# Altium PCB PCB-NW0101 Rev.A.1.PcbDoc (part 1 of 3)
Units mil, origin at the board's own origin, x right, y up, seen from the top; angles counter-clockwise.
Board outline 787.4 x 1377.95 mil, 6 copper layers (Top, GND, Inner3, Inner4, PWR, Bottom), stack 29.136 mil thick; 118 components, 126 nets, 559 pads, 476 vias.
Unrouted connection lines stored in the file: 214.
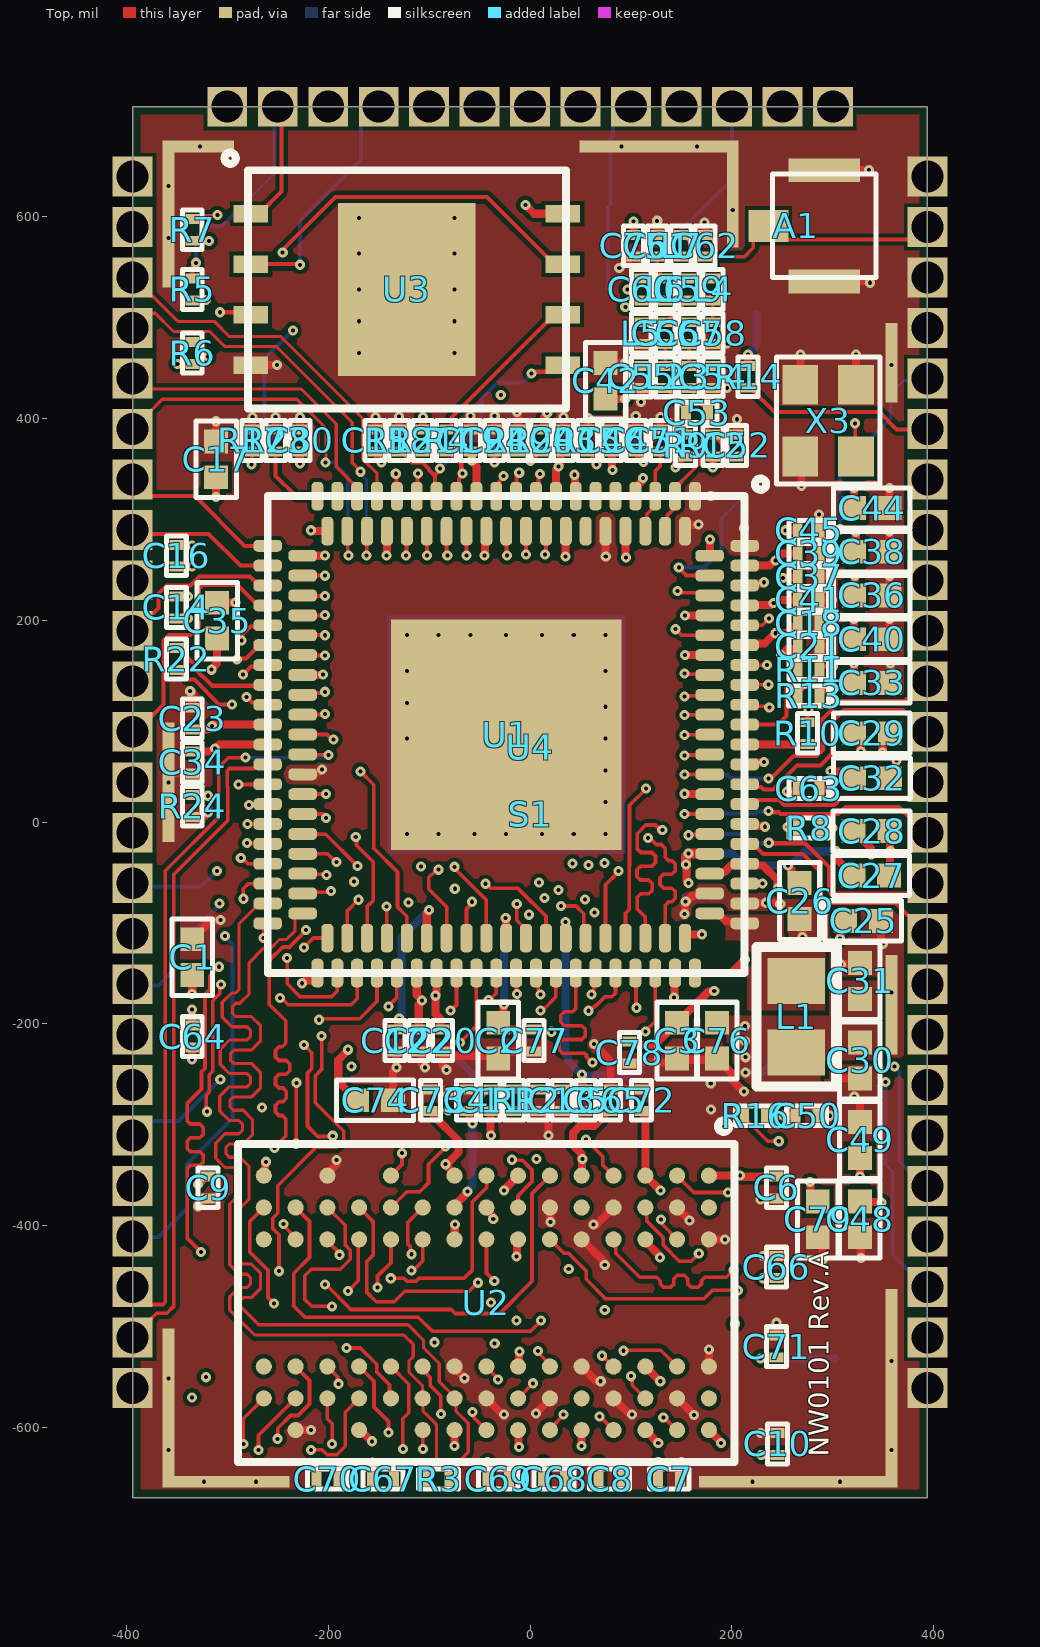
[diagram p0: Top view]
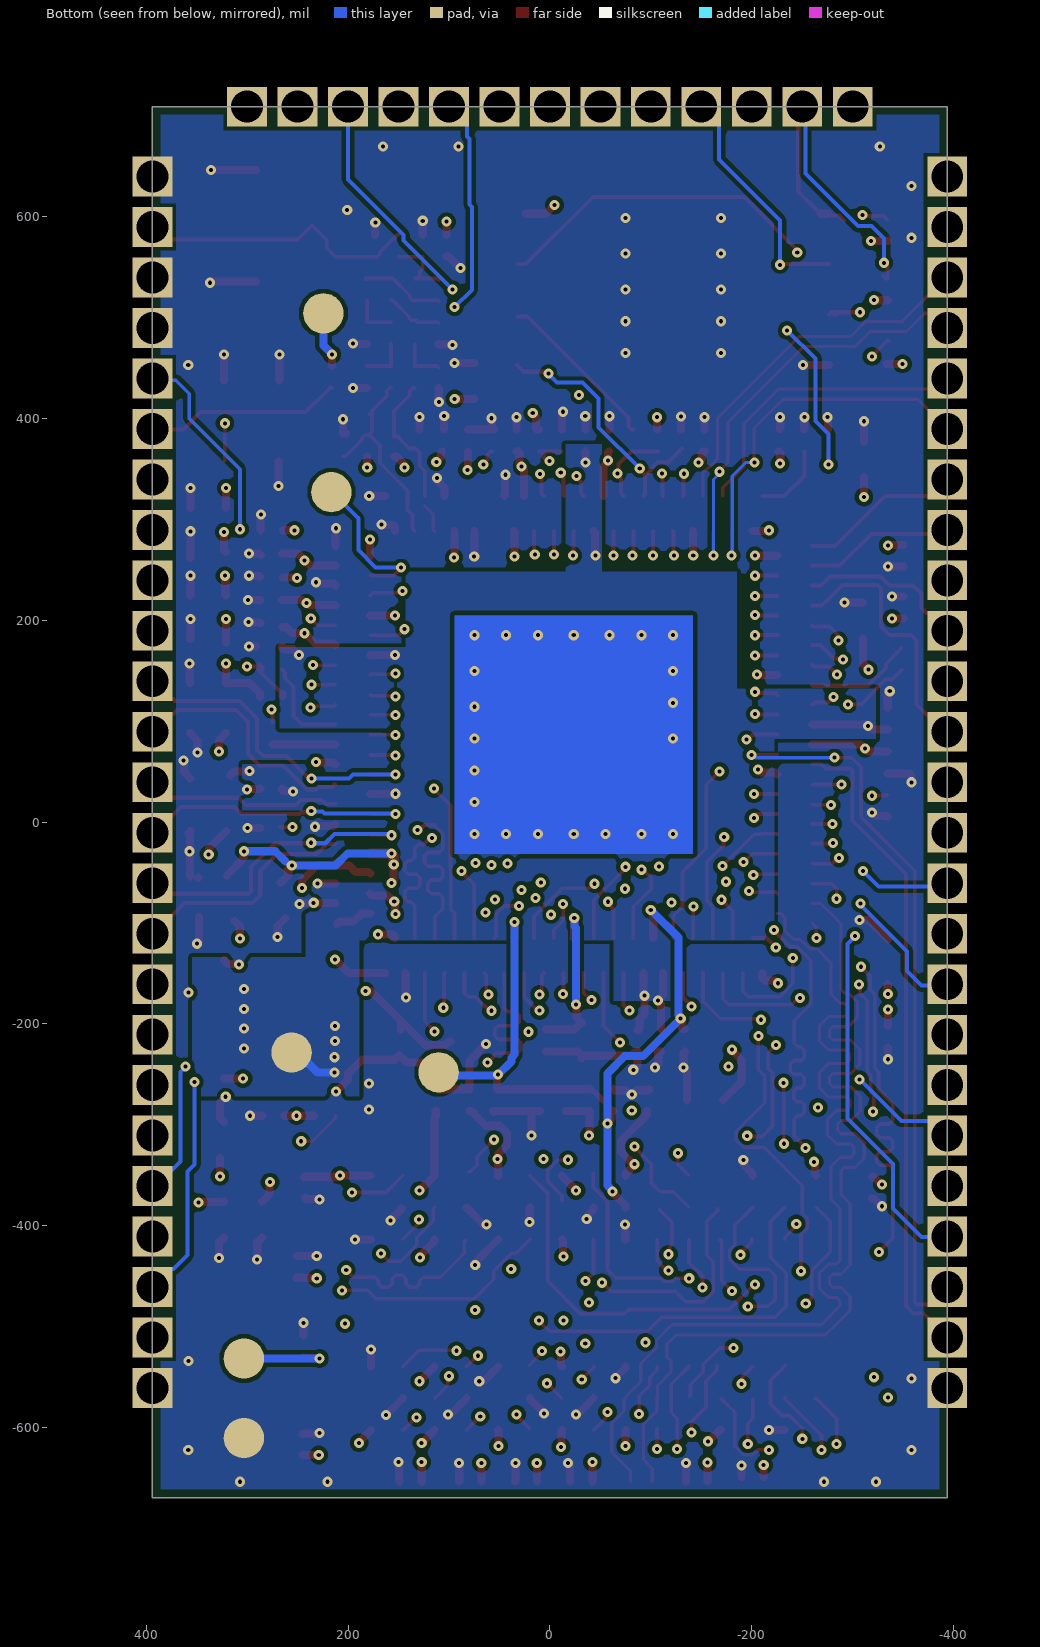
[diagram p1: Bottom view, seen from below]
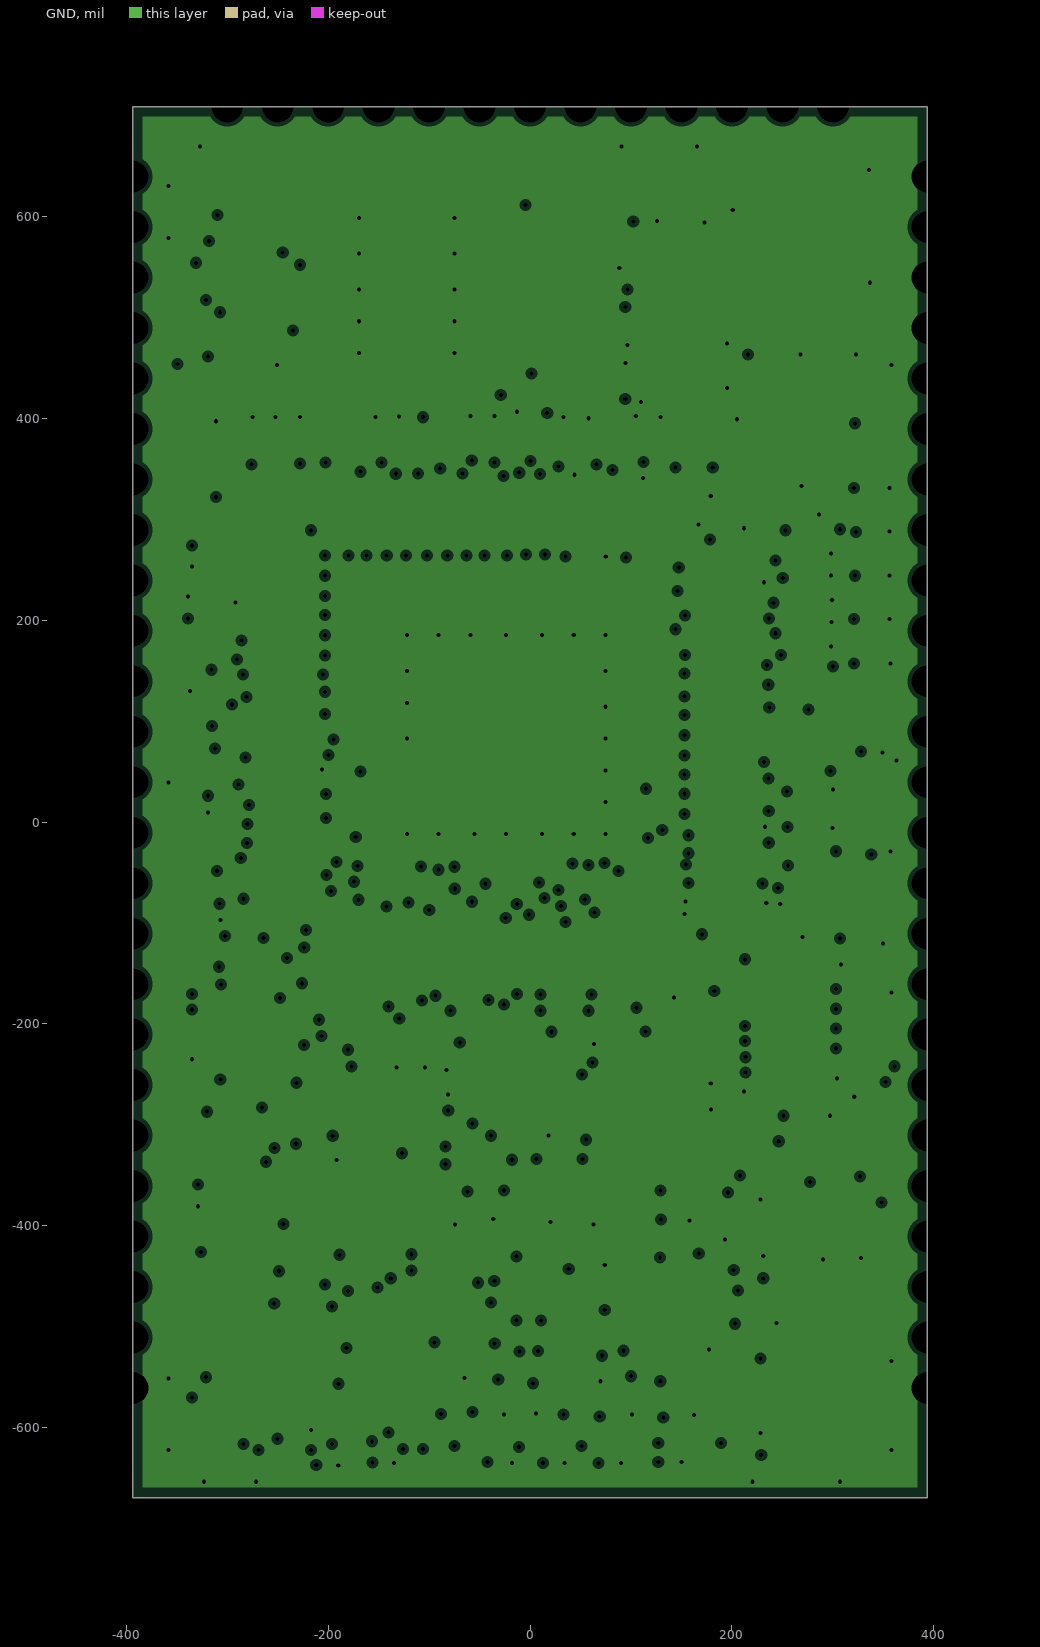
[diagram p2: GND, clearances drawn from the general rule]
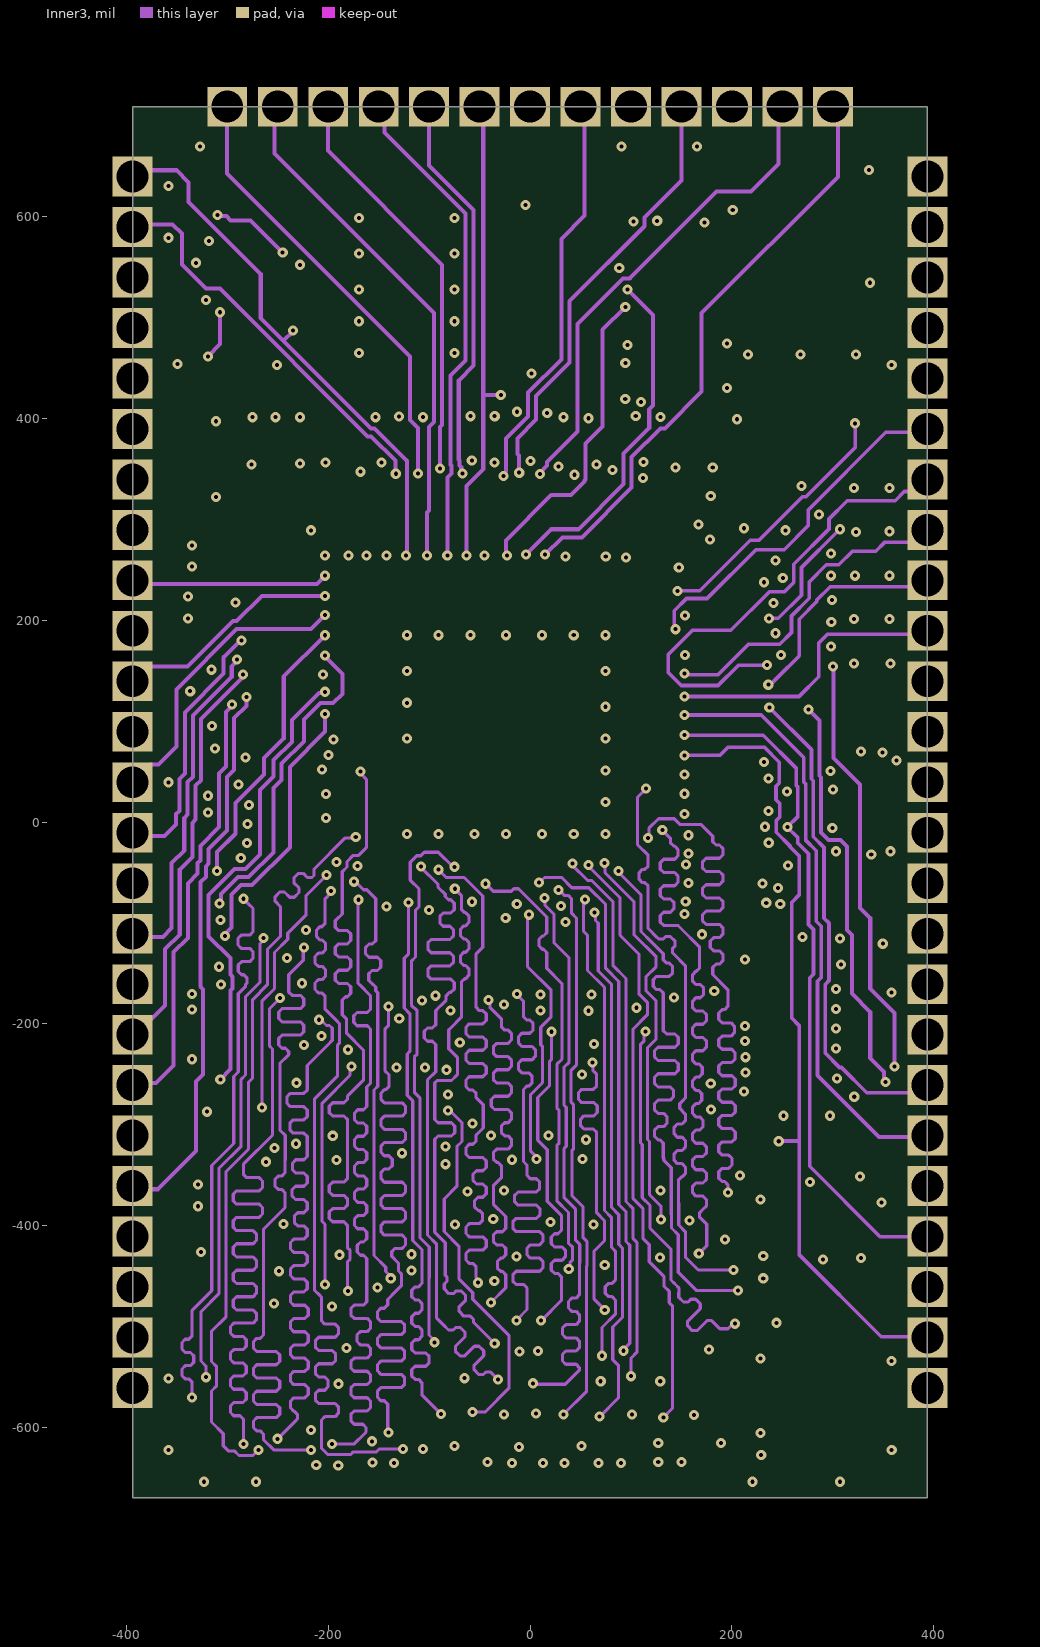
[diagram p3: Inner3]
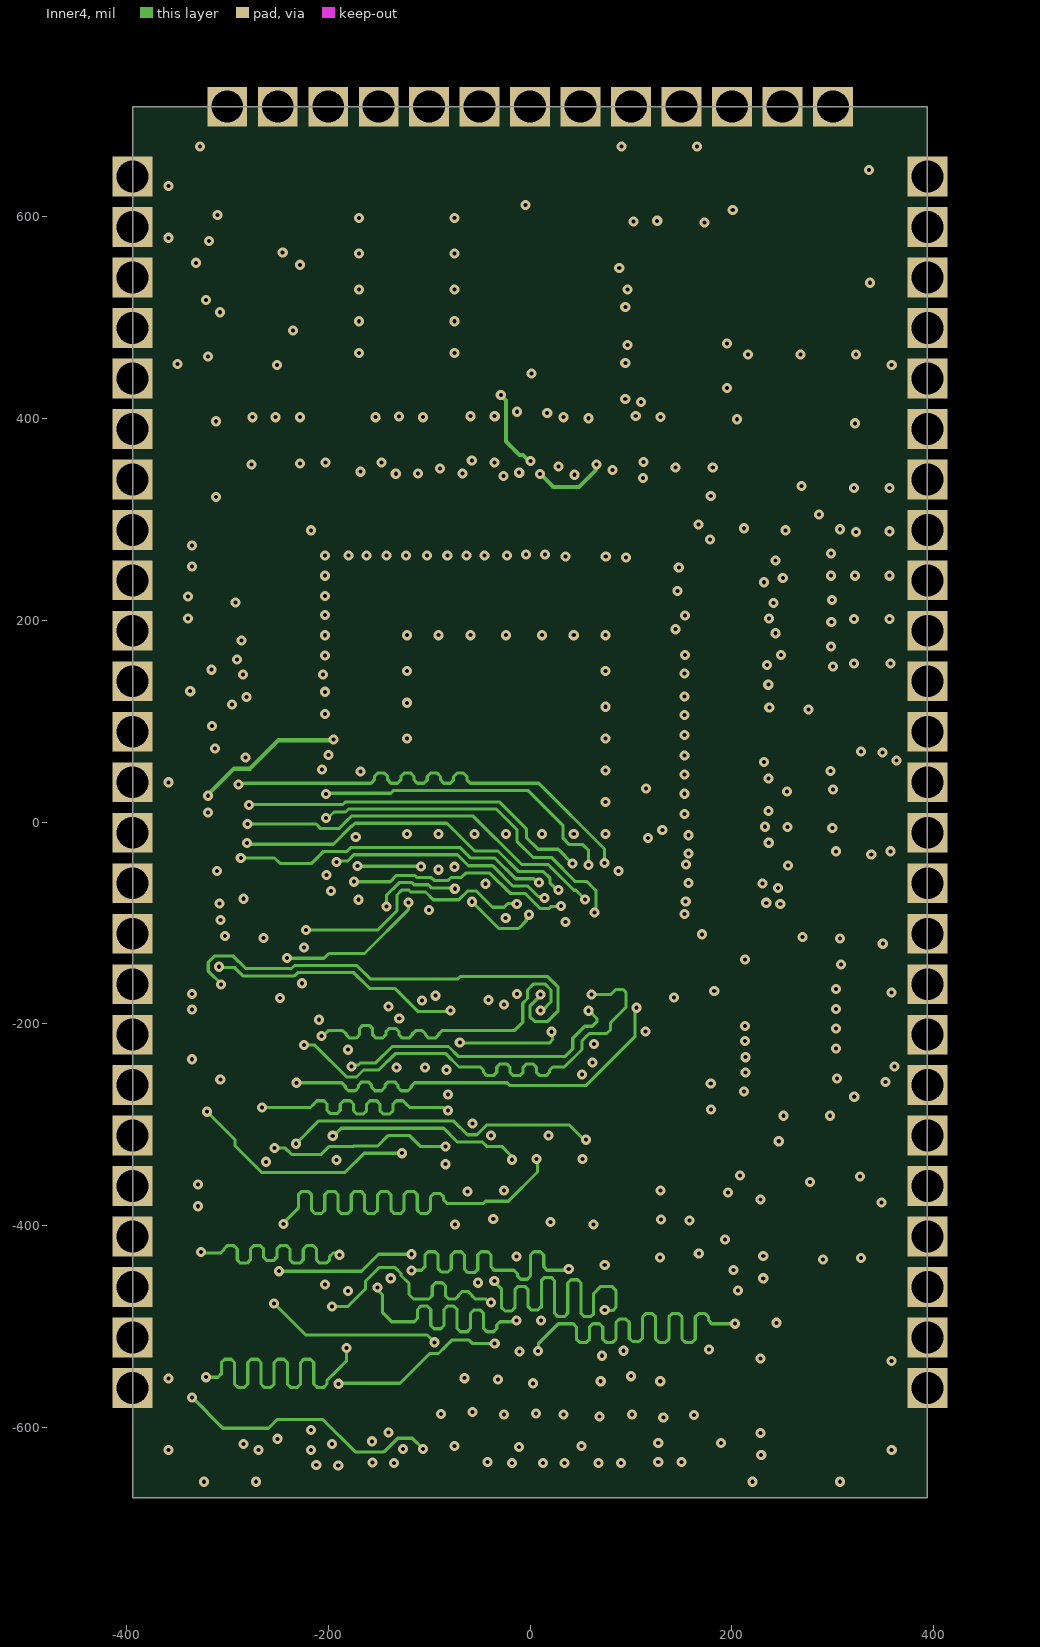
[diagram p4: Inner4]
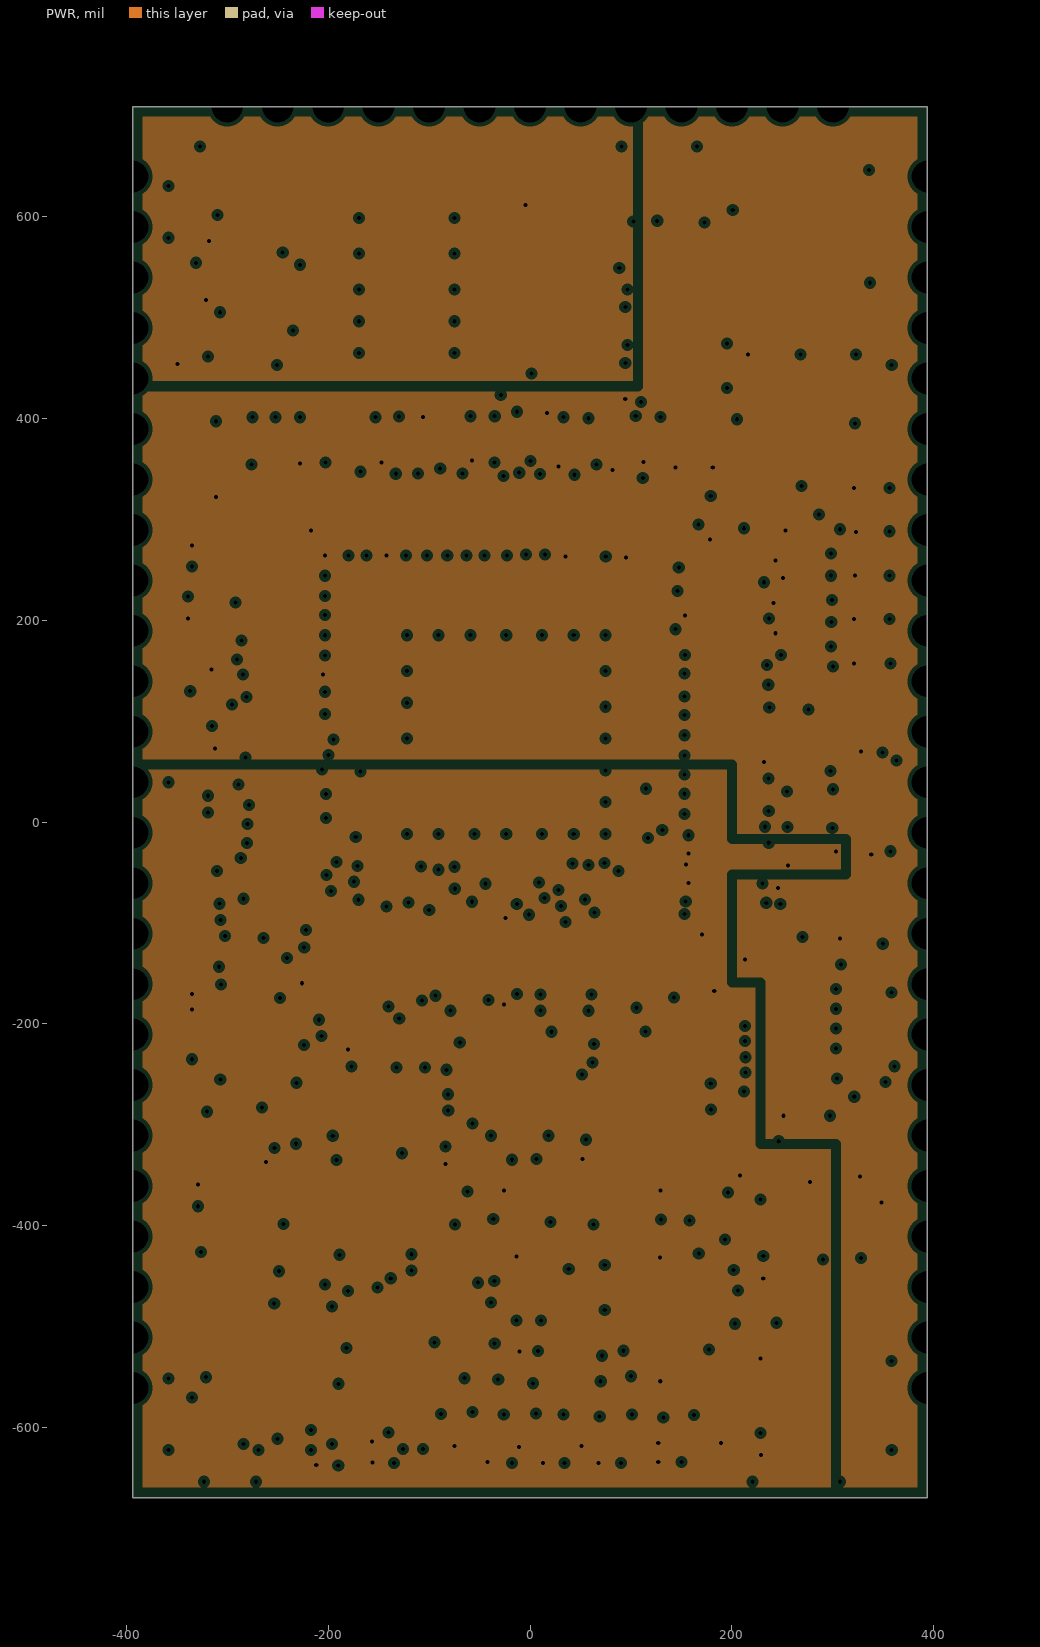
[diagram p5: PWR, clearances drawn from the general rule]
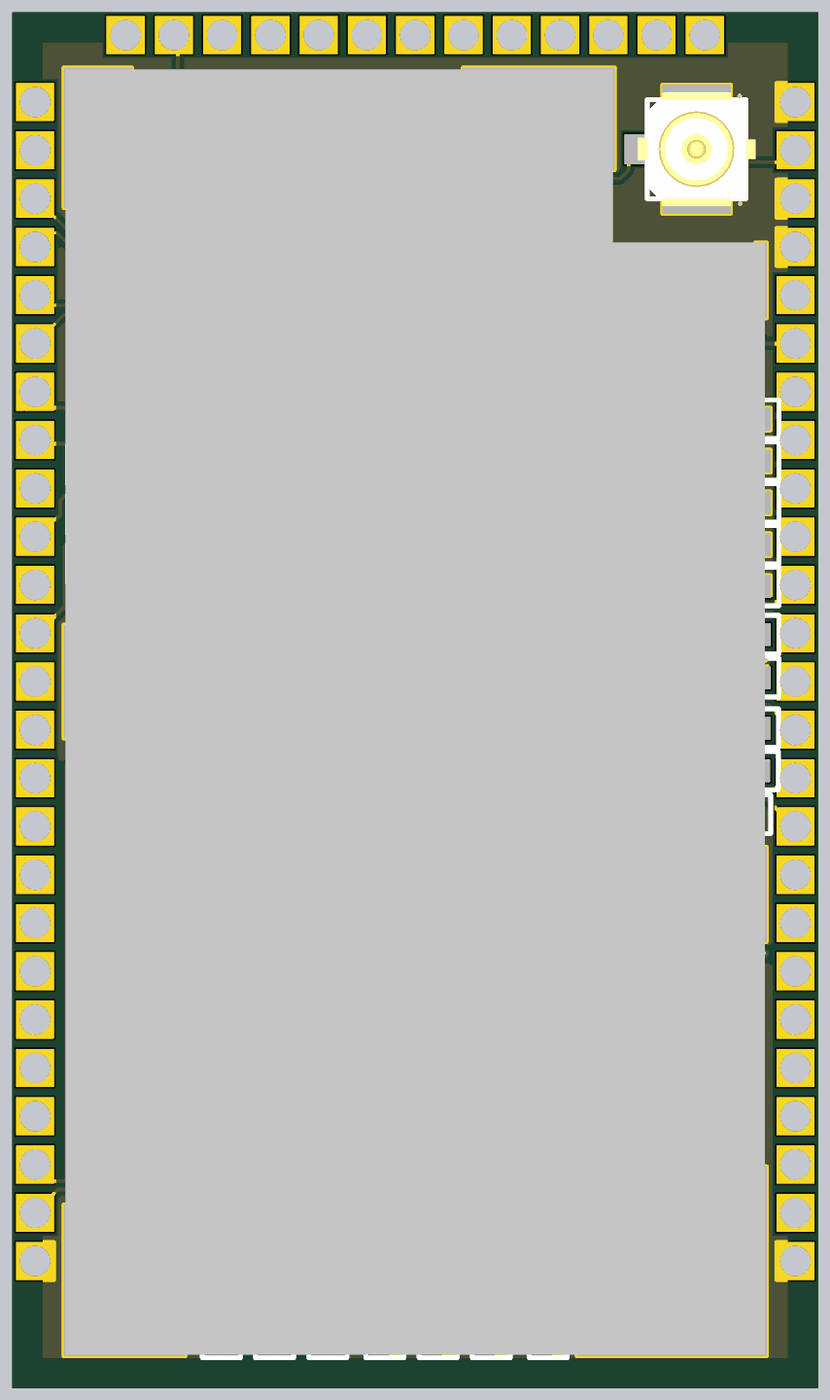
[diagram p8: 3D render of the assembled board from above, using the file's embedded part models]

## Layer stack, top to bottom
Solder Mask Top: solder mask 0.4, Solder Resist, Dk 3.5
Top: signal copper 1.35
Dielectric 1: dielectric 2.362, FR-4, Dk 4.3
GND: plane copper 1.378, net GND
Dielectric2: dielectric 3.1, FR-4, Dk 4.3
Inner3: signal copper 1.378
Dielectric3: dielectric 10, FR-4, Dk 4.3
Inner4: signal copper 1.378
Dielectric4: dielectric 3.1, FR-4, Dk 4.3
PWR: plane copper 1.378, net (Multiple Nets)
Dielectric5: dielectric 2.362, FR-4, Dk 4.3
Bottom: signal copper 1.35
Solder Mask Bottom: solder mask 0.4, Solder Resist, Dk 3.5

## Board outline
-393.7,708.66 393.7,708.66 393.7,-669.29 -393.7,-669.29

## Design rules (kind name [scope] priority, off if disabled: settings)
BoardOutlineClearance [All] p1: gap=8 ignorepadtopadclearanceinfootprint=FALSE except(0: THPad-OutlineEdge THPad-CavityEdge THPad-CutoutEdge; 6: Track-OutlineEdge Track-CavityEdge Track-CutoutEdge)
Clearance "Clearance - Default - DEFAULT - Net" [All] p1: gap=4 ignorepadtopadclearanceinfootprint=FALSE except(6: Via-Via)
ComponentClearance [All] p1: gap=0 collisioncheckmode=3 verticalgap=0 showdistances=FALSE
DiffPairsRouting "DiffPairsRouting - DiffPair - DDRCLK" [InDifferentialPair('DDRCLK')] p1: maxlimit=7 minlimit=5 mostfreqgap=5 toplayer_mingap=7 toplayer_prefgap=7 toplayer_minwidth=3.12 toplayer_maxwidth=3.12 toplayer_prefwidth=3.12 impedanceprofiledriven=TRUE impedanceprofileid={2A60CAE8-979D-4617-9CAD-F7D18D3C7651} impedanceprofilevalue=100.000000 maxuncoupledlength=500
DiffPairsRouting "DiffPairsRouting - DiffPair - ETH_R" [InDifferentialPair('ETH_R') or InDifferentialPair('ETH_T')] p2: maxlimit=7 minlimit=5 mostfreqgap=7 toplayer_mingap=7 toplayer_minwidth=3.12 toplayer_maxwidth=3.12 toplayer_prefwidth=3.12 bottomlayer_mingap=7 bottomlayer_minwidth=3.12 bottomlayer_maxwidth=3.12 bottomlayer_prefwidth=3.12 impedanceprofiledriven=TRUE impedanceprofileid={F7A5DDC0-C5B1-46B8-8866-6746753CC466} impedanceprofilevalue=100.000000 maxuncoupledlength=500
DiffPairsRouting "DiffPairsRouting - DiffPair - USB_D" [InDifferentialPair('USB')] p3: maxlimit=5 minlimit=4.5 mostfreqgap=5 toplayer_mingap=5 toplayer_minwidth=3.6 toplayer_maxwidth=3.6 toplayer_prefwidth=3.6 impedanceprofiledriven=TRUE impedanceprofileid={C5FCCC38-FD2C-4A72-8F5C-545B132D70D5} impedanceprofilevalue=90.000000 maxuncoupledlength=500
DiffPairsRouting "DiffPairsRouting - DiffPair - PCIE" [InDifferentialPair('PCIE_R') or InDifferentialPair('PCIE_T') or InDifferentialPair('PCIE_CLK')] p4: maxlimit=5 minlimit=4 mostfreqgap=5 toplayer_mingap=5 toplayer_minwidth=4.09 toplayer_maxwidth=4.09 toplayer_prefwidth=4.09 bottomlayer_mingap=5 bottomlayer_minwidth=4.08 bottomlayer_maxwidth=4.08 bottomlayer_prefwidth=4.08 impedanceprofiledriven=TRUE impedanceprofileid={683894AC-71DA-4711-AA13-E03A25D4E6CD} impedanceprofilevalue=85.000000 maxuncoupledlength=500
FabricationTestpoint [All] p1: side=3 testpointundercomponent=TRUE minsize=40 maxsize=40 preferedsize=40 minholesize=0 maxholesize=0 preferedholesize=0 testpointgrid=1 allowsidetop=TRUE allowsidebottom=TRUE usegrid=FALSE gridtolerance=0.01
HoleSize [All] p1: absolutevalues=TRUE maxlimit=100 minlimit=0 maxpercent=80.000 minpercent=20.000
HoleToHoleClearance "HoleToHoleClearance - Default - DEFAULT" [All] p1: gap=4 allowstackedmicrovias=TRUE
MatchedLengths [InNetClass('DDR')] p1: tolerance=100 checknetsindiffpair=FALSE checkdiffpairvsdiffpair=TRUE checkxsignals=TRUE checkothers=TRUE
MinimumSolderMaskSliver MinimumSolderMaskSliver_1 [OnLayer('Bottom') vs OnLayer('Bottom')] p1: minsoldermaskwidth=3
MinimumSolderMaskSliver [OnLayer('Top') vs OnLayer('Top')] p2: minsoldermaskwidth=3
PlaneClearance [All] p1: clearance=4
PlaneConnect "Default PlaneConnect" [All] p1: planeconnectstyle=Direct reliefexpansion=20 reliefentries=4 reliefconductorwidth=15 reliefairgap=10
PolygonConnect "PolygonConnect - Default Pad" [All] p1: connectstyle=Direct reliefconductorwidth=15 reliefentries=4 polygonreliefangle="45 Angle" airgapwidth=10
ReturnPath "ReturnPath - DDRCLK" [InNetClass('DDRCLK')] p1: impedanceprofileid={2A60CAE8-979D-4617-9CAD-F7D18D3C7651} _gaplimit=0
ReturnPath ReturnPath-DDR [All] p2: impedanceprofileid={722ABB41-7FFB-403E-9E2B-BB6A49F0BD66} _gaplimit=0
ReturnPath "ReturnPath - RF" [All] p3: impedanceprofileid={3401BA53-1A97-405B-B9A4-8C0F8181F371} _gaplimit=0
ReturnPath "ReturnPath - USB" [All] p4: impedanceprofileid={C5FCCC38-FD2C-4A72-8F5C-545B132D70D5} _gaplimit=0
ReturnPath "ReturnPath - PCIE" [All] p5: impedanceprofileid={683894AC-71DA-4711-AA13-E03A25D4E6CD} _gaplimit=0
ReturnPath "ReturnPath - Eth" [InNetClass('ETH')] p6: impedanceprofileid={F7A5DDC0-C5B1-46B8-8866-6746753CC466} _gaplimit=5
RoutingLayers "RoutingLayers - USB" [InNetClass('USB')] p1: top layer_v5=TRUE mid layer 1_v5=FALSE mid layer 2_v5=FALSE bottom layer_v5=TRUE
RoutingLayers "RoutingLayers - PCIE" [InNetClass('PCIE')] p2: top layer_v5=TRUE mid layer 1_v5=FALSE mid layer 2_v5=FALSE bottom layer_v5=TRUE
RoutingLayers "RoutingLayers - DDRCLK" [InNetClass('DDRCLK')] p3: top layer_v5=TRUE mid layer 1_v5=TRUE mid layer 2_v5=TRUE bottom layer_v5=TRUE
RoutingLayers "RoutingLayers - NetClass - RF" [InNetClass('RF')] p4: top layer_v5=TRUE mid layer 1_v5=FALSE mid layer 2_v5=FALSE bottom layer_v5=FALSE
RoutingLayers "RoutingLayers - NetClass - DDR" [InNetClass('DDR')] p5: top layer_v5=TRUE mid layer 1_v5=TRUE mid layer 2_v5=TRUE bottom layer_v5=TRUE
RoutingLayers "RoutingLayers - ETH" [InNetClass('ETH')] p6: top layer_v5=TRUE mid layer 1_v5=FALSE mid layer 2_v5=FALSE bottom layer_v5=TRUE
RoutingLayers "RoutingLayers - NetClass - Power" [InNetClass('Power')] p7: top layer_v5=TRUE mid layer 1_v5=FALSE mid layer 2_v5=FALSE bottom layer_v5=TRUE
RoutingLayers "RoutingLayers - Net - GND" [InNet('GND')] p8: top layer_v5=TRUE mid layer 1_v5=FALSE mid layer 2_v5=FALSE bottom layer_v5=FALSE
RoutingLayers "RoutingLayers - Default" [All] p9: top layer_v5=TRUE mid layer 1_v5=TRUE mid layer 2_v5=TRUE bottom layer_v5=TRUE
RoutingPriority "RoutingPriority - PCIE" [InNetClass('PCIE')] p1: routingpriority=5
RoutingPriority "RoutingPriority - USB" [InNetClass('USB')] p2: routingpriority=5
RoutingPriority "RoutingPriority - ETH" [InNetClass('ETH')] p3: routingpriority=5
RoutingPriority "RoutingPriority - DDRCLK" [InNetClass('DDRCLK')] p4: routingpriority=5
RoutingPriority "RoutingPriority - DDR" [InNetClass('DDR')] p5: routingpriority=3
RoutingPriority "RoutingPriority - Default" [All] p6: routingpriority=0
RoutingVias "RoutingVias - Default" [All] p1: holewidth=4 width=10 viastyle="Through Hole" minholewidth=0 minwidth=10 maxholewidth=4 maxwidth=40
SolderMaskExpansion "SolderMaskExpansion from CAM settings" [All] p1: expansion=2 istentingtop=FALSE
Width "Width - NetClass -RF" [InNetClass('RF')] p1: maxlimit=6 minlimit=3 preferedwidth=10 toplayer_prefwidth=3.63 impedanceprofiledriven=TRUE impedanceprofileid={3401BA53-1A97-405B-B9A4-8C0F8181F371} impedanceprofilevalue=50.000000 minimp=50.000000 maximp=50.000000 favimp=50.000000
Width "Width - NetClass - DDR" [InNetClass('DDR')] p2: maxlimit=6 minlimit=3 preferedwidth=3.63 toplayer_minwidth=3.63 toplayer_maxwidth=3.63 midlayer1_minwidth=3.1 midlayer1_maxwidth=3.1 midlayer1_prefwidth=3.1 midlayer2_minwidth=3.09 midlayer2_maxwidth=3.09 midlayer2_prefwidth=3.09 impedanceprofiledriven=TRUE impedanceprofileid={722ABB41-7FFB-403E-9E2B-BB6A49F0BD66} impedanceprofilevalue=50.000000 minimp=50.000000 maximp=50.000000 favimp=50.000000
Width "Width - Net - GND" [InNet('GND')] p3: maxlimit=10 minlimit=4 preferedwidth=8 minimp=50.000000 maximp=50.000000 favimp=50.000000
Width "Width - NetClass - Power" [InNetClass('Power')] p4: maxlimit=10 minlimit=4 preferedwidth=8 minimp=50.000000 maximp=50.000000 favimp=50.000000
Width "Width - DEFAULT" [All] p5: maxlimit=10 minlimit=3 preferedwidth=4 minimp=50.000000 maximp=50.000000 favimp=50.000000
20 further rules are at their usual default settings.

## Classes and differential pairs
net class DDRCLK: DDR_CLK_N DDR_CLK_P
net class ETH: ETH_RN ETH_RP ETH_TN ETH_TP
net class PCIE: PCIE_CKN PCIE_CKP PCIE_RXN PCIE_RXP PCIE_TXN PCIE_TXP
net class USB: USB_D+ USB_D-
net class DDR: DDR_A0 DDR_A1 DDR_A2 DDR_A3 DDR_A4 DDR_A5 DDR_A6 DDR_A7 DDR_A8 DDR_A9 DDR_A10 DDR_A11 DDR_A12 DDR_A13 DDR_BA0 DDR_BA1 DDR_BA2 DDR_CAS DDR_CKE DDR_CS DDR_D0 DDR_D1 DDR_D2 DDR_D3 DDR_D4 DDR_D5 DDR_D6 DDR_D7 DDR_D8 DDR_D9 DDR_D10 DDR_D11 DDR_D12 DDR_D13 DDR_D14 DDR_D15 DDR_LDM DDR_LDQS DDR_ODT DDR_RAS DDR_UDM DDR_UDQS DDR_WE
net class RF: ANT_OUT RF_DIFF+ RF_DIFF- RF_HP+ RF_HP- RF_LP RF_LP+ RF_LP- RF_NOTCH
net class Power: 1V2 1V8 3V3 DDR_1V8 DDR_VREF LXBK VDD_FLASH
component class WIFI: A1 C36 C37 C38 C39 C40 C41 C42 C43 C44 C45 C46 C47 C48 C49 C50 C51 C52 C53 C54 C55 C56 C57 C58 C59 C60 C61 C62 L2 L3 L4 L5 L6 L7 R9 R12 X3
component class USB_PCIE: C32 C33 C34 C35 C63 R16 R24
component class POWER: C18 C19 C20 C21 C22 C23 C24 C25 C26 C27 C28 C29 C30 C31 C76 L1 U1
component class MISC: C75 R4 R5 R6 R7 R8 R10 R11 R13 R14 R15 R17 R18 R19 R20 R21 U3
component class MEMORY: C1 C2 C3 C4 C5 C6 C7 C8 C9 C10 C11 C12 C13 C64 C65 C66 C67 C68 C69 C70 C71 C72 C73 C74 C77 C78 C79 R1 R2 R3 U2
component class INTERFACE: S1 U4
component class ETH_JTAG_SD: C14 C15 C16 C17 C80 R22 R23
differential pair PCIE_CLK: +PCIE_CKP -PCIE_CKN
differential pair PCIE_R: +PCIE_RXP -PCIE_RXN
differential pair DDRCLK: +DDR_CLK_P -DDR_CLK_N
differential pair ETH_R: +ETH_RP -ETH_RN
differential pair ETH_T: +ETH_TP -ETH_TN

## Components (designator, comment, footprint, x,y, rotation, side; value= is the part's Value field where it differs from the comment)
A1 "CONMHF1-SMD-G-T" CONMHF1-SMD-G-T 291.34,590.55 r0 top locked
C1 "CAP0402-105-6.3V-X7R" C0402 -334.65,-133.86 r90 top value="1uF 16V X7R"
C2 "CAP0402-105-6.3V-X7R" C0402 -31.5,-216.54 r270 top value="1uF 16V X7R"
C3 "CAP0402-105-6.3V-X7R" C0402 145.67,-216.54 r270 top value="1uF 16V X7R"
C4 "CAP0201-104-16V-X7R" C0201 -62.99,-275.59 r90 top value="0.1uF 16V X7R"
C5 "CAP0201-104-16V-X7R" C0201 55.12,-275.59 r270 top value="0.1uF 16V X7R"
C6 "CAP0201-104-16V-X7R" C0201 244.09,-362.2 r270 top value="0.1uF 16V X7R"
C7 "CAP0201-104-16V-X7R" C0201 137.8,-650.9 r0 top value="0.1uF 16V X7R"
C8 "CAP0201-104-16V-X7R" C0201 78.74,-650.9 r0 top value="0.1uF 16V X7R"
C9 "CAP0201-104-16V-X7R" C0201 -318.9,-362.2 r270 top value="0.1uF 16V X7R"
C10 "CAP0201-104-16V-X7R" C0201 245.08,-616.14 r90 top value="0.1uF 16V X7R"
C11 "CAP0201-104-16V-X7R" C0201 -39.37,-275.59 r90 top value="0.1uF 16V X7R"
C12 "CAP0201-104-16V-X7R" C0201 -133.86,-216.54 r270 top value="0.1uF 16V X7R"
C13 "CAP0201-104-16V-X7R" C0201 31.5,-275.59 r270 top value="0.1uF 16V X7R"
C14 "CAP0201-104-16V-X7R" C0201 -350.39,212.6 r90 top value="0.1uF 16V X7R"
C15 "CAP0201-104-16V-X7R" C0201 -153.54,377.95 r90 top value="0.1uF 16V X7R"
C16 "CAP0201-104-16V-X7R" C0201 -350.39,263.78 r270 top value="0.1uF 16V X7R"
C17 "CAP0402-105-6.3V-X7R" C0402 -311,359.28 r90 top value="1uF 16V X7R"
C18 "CAP0201-104-16V-X7R" C0201 276,197 r0 top value="0.1uF 16V X7R"
C19 "CAP0201-104-16V-X7R" C0201 -59.06,377.95 r90 top value="0.1uF 16V X7R"
C20 "CAP0201-104-16V-X7R" C0201 -86.61,-216.54 r270 top value="0.1uF 16V X7R"
C21 "CAP0201-104-16V-X7R" C0201 276,174 r0 top value="0.1uF 16V X7R"
C22 "CAP0201-104-16V-X7R" C0201 -110.24,-216.54 r270 top value="0.1uF 16V X7R"
C23 "CAP0201-104-16V-X7R" C0201 -334.65,102.36 r90 top value="0.1uF 16V X7R"
C24 "CAP0201-104-16V-X7R" C0201 -35.43,377.95 r90 top value="0.1uF 16V X7R"
C25 "CAP0402-225-6.3V-X7R" C0402 330,-98 r0 top value="2.2uF 10V X7R"
C26 "CAP0402-475-10V-X5R" C0402 267,-78.28 r270 top value="4.7uF 10V X5R"
C27 "CAP0402-225-6.3V-X7R" C0402 338,-53 r0 top value="2.2uF 10V X7R"
C28 "CAP0402-105-6.3V-X7R" C0402 338.28,-9 r0 top value="1uF 16V X7R"
C29 "CAP0402-105-6.3V-X7R" C0402 338.58,87.99 r0 top value="1uF 16V X7R"
C30 "CAP0402-106-6.3V-X5R" C0402 326.77,-236.22 r270 top value="10uF 6.3V X5R"
C31 "CAP0402-106-6.3V-X5R" C0402 326.77,-157.48 r90 top value="10uF 6.3V X5R"
C32 "CAP0402-475-10V-X5R" C0402 338.72,43.31 r0 top value="4.7uF 10V X5R"
C33 "CAP0402-475-10V-X5R" C0402 338.58,137.8 r0 top value="4.7uF 10V X5R"
C34 "CAP0201-104-16V-X7R" C0201 -334.65,59.06 r270 top value="0.1uF 16V X7R"
C35 "CAP0402-475-10V-X5R" C0402 -310,199.48 r90 top value="4.7uF 10V X5R"
C36 "CAP0402-105-6.3V-X7R" C0402 338.58,224.41 r0 top value="1uF 16V X7R"
C37 "CAP0201-101-16V-X7R" C0201 276,243 r0 top value="100pF 16V X7R"
C38 "CAP0402-105-6.3V-X7R" C0402 338.58,267.72 r0 top value="1uF 16V X7R"
C39 "CAP0201-101-16V-X7R" C0201 276,266 r0 top value="100pF 16V X7R"
C40 "CAP0402-225-6.3V-X7R" C0402 338.58,181.1 r0 top value="2.2uF 10V X7R"
C41 "CAP0201-101-16V-X7R" C0201 276,220 r0 top value="100pF 16V X7R"
C42 "CAP0402-105-6.3V-X7R" C0402 74.8,437.01 r90 top value="1uF 16V X7R"
C43 "CAP0201-101-16V-X7R" C0201 33,378 r90 top value="100pF 16V X7R"
C44 "CAP0402-105-6.3V-X7R" C0402 338.58,311.02 r0 top value="1uF 16V X7R"
C45 "CAP0201-101-16V-X7R" C0201 276,289 r0 top value="100pF 16V X7R"
C46 "CAP0201-101-16V-X7R" C0201 81,378 r90 top value="100pF 16V X7R"
C47 "CAP0201-101-16V-X7R" C0201 105,378 r90 top value="100pF 16V X7R"
C48 "CAP0402-105-6.3V-X7R" C0402 326.77,-393.7 r270 top value="1uF 16V X7R"
C49 "CAP0402-475-10V-X5R" C0402 326.77,-314.96 r90 top value="4.7uF 10V X5R"
C50 "CAP0201-100-25V-NP0" C0201 274,-291 r0 top value="10pF 25V NP0"
C51 "CAP0201-020-25V-NP0" C0201 129,378 r270 top value="2pF 25V NP0"
C52 "CAP0201-020-25V-NP0" C0201 204.72,373 r90 top value="2pF 25V NP0"
C53 "CAP0201-NOP" C0201_NOP 165.35,405.51 r0 top value=NOP
C54 "CAP0201-NOP" C0201_NOP 181.1,440.94 r270 top value=NOP
C55 "CAP0201-NOP" C0201_NOP 110.24,440.94 r270 top value=NOP
C56 "CAP0201-100-25V-NP0" C0201 133.86,484.25 r270 top value="10pF 25V NP0"
C57 "CAP0201-100-25V-NP0" C0201 157.48,484.25 r270 top value="10pF 25V NP0"
C58 "CAP0201-1R2-25V-NP0" C0201 181.1,484.25 r270 top value="1.2PF 25V NP0"
C59 "CAP0201-1R2-25V-NP0" C0201 157.48,527.56 r270 top value="1.2PF 25V NP0"
C60 "CAP0201-090-100V-NP0" C0201 110.24,527.56 r270 top value="9pF 25V NP0"
C61 "CAP0201-020-25V-NP0" C0201 125.98,570.87 r90 top value="2pF 25V NP0"
C62 "CAP0201-020-25V-NP0" C0201 173.23,570.87 r90 top value="2pF 25V NP0"
C63 "CAP0201-104-16V-X7R" C0201 276,33 r180 top value="0.1uF 16V X7R"
C64 "CAP0201-152-16V-X7R" C0201 -334.65,-212.6 r270 top value="1.5nF 16V X7R"
C65 "CAP0201-104-16V-X7R" C0201 79.81,-275.59 r90 top value="0.1uF 16V X7R"
C66 "CAP0201-104-16V-X7R" C0201 244.09,-440.94 r90 top value="0.1uF 16V X7R"
C67 "CAP0201-104-16V-X7R" C0201 -145.67,-650.9 r0 top value="0.1uF 16V X7R"
C68 "CAP0201-104-16V-X7R" C0201 23.62,-650.9 r0 top value="0.1uF 16V X7R"
C69 "CAP0201-104-16V-X7R" C0201 -31.5,-650.9 r0 top value="0.1uF 16V X7R"
C70 "CAP0201-104-16V-X7R" C0201 -200.79,-650.9 r0 top value="0.1uF 16V X7R"
C71 "CAP0201-104-16V-X7R" C0201 244.09,-519.68 r90 top value="0.1uF 16V X7R"
C72 "CAP0201-104-16V-X7R" C0201 110.24,-275.59 r90 top value="0.1uF 16V X7R"
C73 "CAP0201-104-16V-X7R" C0201 -98.43,-275.59 r90 top value="0.1uF 16V X7R"
C74 "CAP0402-225-6.3V-X7R" C0402 -153.54,-275.59 r0 top value="2.2uF 10V X7R"
C75 "CAP0201-104-16V-X7R" C0201 102.36,570.87 r270 top value="0.1uF 16V X7R"
C76 "CAP0402-475-10V-X5R" C0402 185.04,-216.54 r270 top value="4.7uF 10V X5R"
C77 "CAP0201-152-16V-X7R" C0201 3.94,-216.54 r270 top value="1.5nF 16V X7R"
C78 "CAP0201-152-16V-X7R" C0201 98.43,-228.35 r270 top value="1.5nF 16V X7R"
C79 "CAP0402-475-10V-X5R" C0402 285,-393.7 r270 top value="4.7uF 10V X5R"
C80 "CAP0201-104-16V-X7R" C0201 -228,377.95 r90 top value="0.1uF 16V X7R"
L1 "IND0805_2.2U_1.9A" L0805 263.78,-192.91 r270 top value="2.2uH 1.9A"
L2 "IND0201_1.5N_600MA" L0201 133.86,440.94 r90 top value=1.5nH
L3 "IND0201_1.5N_600MA" L0201 157.48,440.94 r90 top value=1.5nH
L4 "IND0201_2.5N_500MA" L0201 181.1,527.56 r90 top value=2.5nH
L5 "IND0201_2.5N_500MA" L0201 110.24,484.25 r270 top value=2.5nH
L6 "IND0201_1.8N_200MA" L0201 133.86,527.56 r90 top value="1.8nH 200mA"
L7 "IND0201_1.5N_600MA" L0201 149.61,570.87 r90 top value=1.5nH
R1 "RES0201-1K00" R0201 -15.75,-275.59 r270 top value="1K00 1% 1/20W"
R2 "RES0201-1K00" R0201 7.87,-275.59 r90 top value="1K00 1% 1/20W"
R3 "RES0201-100R" R0201 -90.55,-650.9 r0 top value="100R 1% 1/20W"
R4 "RES0201-22R0" R0201 -82.68,377.95 r90 top value="22R0 1% 1/20W"
R5 "RES0201-4K70" R0201 -334.65,527.56 r270 top value="4K70 1% 1/20W"
R6 "RES0201-10K0" R0201 -334.65,464.57 r270 top value="10K0 1% 1/20W"
R7 "RES0201-10K0" R0201 -334.65,586.61 r270 top value="10K0 1% 1/20W"
R8 "RES0201-4K70" R0201 276,-6 r180 top value="4K70 1% 1/20W"
R9 "RES0201-50R0" R0201 154,372.99 r270 top value="50R 1% 0.075W"
R10 "RES0201-22R0" R0201 275,88 r270 top value="22R0 1% 1/20W"
R11 "RES0201-22R0" R0201 276,151 r0 top value="22R0 1% 1/20W"
R12 "RES0201-50R0" R0201 181.1,373 r270 top value="50R 1% 0.075W"
R13 "RES0201-10K0" R0201 275.89,125 r0 top value="10K0 1% 1/20W"
R14 "RES0201-4K70" R0201 216,441 r90 top value="4K70 1% 1/20W"
R15 "RES0201-4K70" R0201 57,378 r270 top value="4K70 1% 1/20W"
R16 "RES0201-10K0" R0201 223,-291 r0 top value="10K0 1% 1/20W"
R17 "RES0201-4K70" R0201 -275.59,377.95 r270 top value="4K70 1% 1/20W"
R18 "RES0201-4K70" R0201 -129.92,377.95 r270 top value="4K70 1% 1/20W"
R19 "RES0201-4K70" R0201 -11.81,377.95 r270 top value="4K70 1% 1/20W"
R20 "RES0201-NOP" R0201_NOP 11,378 r270 top value=NOP
R21 "RES0201-4K70" R0201 -106.3,377.95 r270 top value="4K70 1% 1/20W"
R22 "RES0201-22R0" R0201 -350.39,161.42 r90 top value="22R0 1% 1/20W"
R23 "RES0201-24K3" R0201 -251.97,377.95 r90 top value="24K3 1% 1/20W"
R24 "RES0201-5K10" R0201 -334.65,15.75 r270 top value="5K10 1% 1/20W"
S1 "O2S-SHIELD" O2S-SHIELD 3.94,-3.94 r0 top locked
U1 "MT7688AN" DR-QFN-128 -23.62,86.61 r270 top locked
U2 "W9751G6NB-25" TWBGA-84_8X12P5_ISI -43.31,-476.38 r270 top locked
U3 "W25Q128JVEIQ" WIN_E-8_WIN -122.05,527.56 r0 top locked
U4 "OMEGA2S-PCB" OMEGA2S+PCB 0,239.37 r0 top locked
X3 "R2520-40.000-12-F-1010-TR-NS1" R2520-40.000-12-F-1010-TR-NS1 295.28,397.64 r270 top value=40Mhz

## Footprints (in the part's own frame and the unit in brackets; to place one, negate y for a bottom-side part, rotate by r counter-clockwise, add the part's x,y. Pads: shape width x height; smd on the part's side, far side on the other; paste and mask are expansions set on the pad)
C0201 [mm]
  rect 0.25x0.35 smd: 1(-0.275,0) 2(0.275,0)
  silkscreen extent -0.5,-0.25 0.5,0.25, body extent -0.3,-0.15 0.3,0.15, height 0.35
C0201_NOP [mm]
  rect 0.25x0.35 smd: 1(-0.275,0) 2(0.275,0)
  silkscreen extent -0.5,-0.25 0.5,0.25
C0402 [mm]
  rrect0% 0.6x0.6 smd: 1(-0.45,0) 2(0.45,0)
  silkscreen extent -0.97,-0.51 0.97,0.51, body extent -0.5,-0.25 0.5,0.25, height 0.65
CONMHF1-SMD-G-T [mm]
  rect 1x0.8 smd: 1(-1.4,0)
  rect 1.8x0.6 smd: 2(0,-1.4) 3(0,1.4)
  silkscreen extent -1.3,-1.3 1.3,1.3, body extent -1.55,-1.5 1.55,1.5, height 1.31
DR-QFN-128 [mm]
  rrect70% 0.72x0.3 smd: 1(-6,4.75) 2(-5.12,4.5) 3(-6,4.25) 4(-5.12,4) 5(-6,3.75) 6(-5.12,3.5) 7(-6,3.25) 8(-5.12,3) 9(-6,2.75) 10(-5.12,2.5) 11(-6,2.25) 12(-5.12,2) 13(-6,1.75) 14(-5.12,1.5) 15(-6,1.25) 16(-5.12,1) 17(-6,0.75) 18(-5.12,0.5) 19(-6,0.25) 20(-5.12,0) 21(-6,-0.25) 22(-5.12,-0.5) 23(-6,-0.75) 24(-5.12,-1) 25(-6,-1.25) 26(-5.12,-1.5) 27(-6,-1.75) 28(-5.12,-2) 29(-6,-2.25) 30(-5.12,-2.5) 31(-6,-2.75) 32(-5.12,-3) 33(-6,-3.25) 34(-5.12,-3.5) 35(-6,-3.75) 36(-5.12,-4) 37(-6,-4.25) 38(-5.12,-4.5) 39(-6,-4.75)
  rrect70% 0.3x0.72 smd: 40(-4.75,-6) 41(-4.5,-5.12) 42(-4.25,-6) 43(-4,-5.12) 44(-3.75,-6) 45(-3.5,-5.12) 46(-3.25,-6) 47(-3,-5.12) 48(-2.75,-6) 49(-2.5,-5.12) 50(-2.25,-6) 51(-2,-5.12) 52(-1.75,-6) 53(-1.5,-5.12) 54(-1.25,-6) 55(-1,-5.12) 56(-0.75,-6) 57(-0.5,-5.12) 58(-0.25,-6) 59(0,-5.12) 60(0.25,-6) 61(0.5,-5.12) 62(0.75,-6) 63(1,-5.12) 64(1.25,-6) 65(1.5,-5.12) 66(1.75,-6) 67(2,-5.12) 68(2.25,-6) 69(2.5,-5.12) 70(2.75,-6) 71(3,-5.12) 72(3.25,-6) 73(3.5,-5.12) 74(3.75,-6) 75(4,-5.12) 76(4.25,-6) 77(4.5,-5.12) 78(4.75,-6) 118(4.75,6) 119(4.5,5.12) 120(4.25,6) 121(4,5.12) 122(3.75,6) 123(3.5,5.12) 124(3.25,6) 125(3,5.12) 126(2.75,6) 127(2.5,5.12) 128(2.25,6) 129(2,5.12) 130(1.75,6) 131(1.5,5.12) 132(1.25,6) 133(1,5.12) 134(0.75,6) 135(0.5,5.12) 136(0.25,6) 137(0,5.12) 138(-0.25,6) 139(-0.5,5.12) 140(-0.75,6) 141(-1,5.12) 142(-1.25,6) 143(-1.5,5.12) 144(-1.75,6) 145(-2,5.12) 146(-2.25,6) 147(-2.5,5.12) 148(-2.75,6) 149(-3,5.12) 150(-3.25,6) 151(-3.5,5.12) 152(-3.75,6) 153(-4,5.12) 154(-4.25,6) 155(-4.5,5.12) 156(-4.75,6)
  rrect70% 0.72x0.3 smd rot 179.99: 79(6,-4.75) 80(5.12,-4.5) 81(6,-4.25) 82(5.12,-4) 83(6,-3.75) 84(5.12,-3.5) 85(6,-3.25) 86(5.12,-3) 87(6,-2.75) 88(5.12,-2.5) 89(6,-2.25) 90(5.12,-2) 91(6,-1.75) 92(5.12,-1.5) 93(6,-1.25) 94(5.12,-1) 95(6,-0.75) 96(5.12,-0.5) 97(6,-0.25) 98(5.12,0) 99(6,0.25) 100(5.12,0.5) 101(6,0.75) 102(5.12,1) 103(6,1.25) 104(5.12,1.5) 105(6,1.75) 106(5.12,2) 107(6,2.25) 108(5.12,2.5) 109(6,2.75) 110(5.12,3) 111(6,3.25) 112(5.12,3.5) 113(6,3.75) 114(5.12,4) 115(6,4.25) 116(5.12,4.5) 117(6,4.75)
  rrect0% 5.8x5.8 smd: 157(0,0)
  silkscreen extent -6.44,-6 6,6.54
L0201 [mm]
  rect 0.25x0.35 smd: 1(-0.275,0) 2(0.275,0)
  silkscreen extent -0.5,-0.25 0.5,0.25, body extent -0.3,-0.15 0.3,0.15, height 0.23
L0805 [mm]
  rect 1.15x1.45 smd: 1(-0.9,0) 2(0.9,0)
  silkscreen extent -1.75,-1 1.75,1, body extent -1,-0.63 1,0.63, height 0.61
O2S-SHIELD [mm]
  rect 0.3x3.7 smd: 1(-9.2,15.4)
  rect 0.3x3 smd: 2(-9.2,1.1)
  rect 0.3x4 smd: 3(-9.2,-14.65)
  rect 3.2x0.3 smd: 4(-7.75,-16.5)
  rect 5x0.3 smd: 5(6.65,-16.5)
  rect 0.3x5 smd: 6(9,-14.15)
  rect 0.3x2.5 smd: 7(9,-4.5)
  rect 0.3x2 smd: 8(9,11.65)
  rect 1.8x0.3 smd: 9(-8.45,17.1)
  rect 4x0.3 smd: 10(3.15,17.1)
  rect 0.3x2.7 smd: 11(5,15.9)
  body extent -9.3,-16.6 9.1,17.2, height 2
OMEGA2S+PCB [mm]
  rect 1x1 hole 0.8: A1(7.62,11.92) A2(6.35,11.92) A3(5.08,11.92) A4(3.81,11.92) A5(2.54,11.92) A6(1.27,11.92) A7(0,11.92) A8(-1.27,11.92) A9(-2.54,11.92) A10(-3.81,11.92) A11(-5.08,11.92) A12(-6.35,11.92) A13(-7.62,11.92) B1(-10,10.16) B2(-10,8.89) B3(-10,7.62) B4(-10,6.35) B5(-10,5.08) B6(-10,3.81) B7(-10,2.54) B8(-10,1.27) B9(-10,0) B10(-10,-1.27) B11(-10,-2.54) B12(-10,-3.81) B13(-10,-5.08) B14(-10,-6.35) B15(-10,-7.62) B16(-10,-8.89) B17(-10,-10.16) B18(-10,-11.43) B19(-10,-12.7) B20(-10,-13.97) B21(-10,-15.24) B22(-10,-16.51) B23(-10,-17.78) B24(-10,-19.05) B25(-10,-20.32) C1(10,10.16) C2(10,8.89) C3(10,7.62) C4(10,6.35) C5(10,5.08) C6(10,3.81) C7(10,2.54) C8(10,1.27) C9(10,0) C10(10,-1.27) C11(10,-2.54) C12(10,-3.81) C13(10,-5.08) C14(10,-6.35) C15(10,-7.62) C16(10,-8.89) C17(10,-10.16) C18(10,-11.43) C19(10,-12.7) C20(10,-13.97) C21(10,-15.24) C22(10,-16.51) C23(10,-17.78) C24(10,-19.05) C25(10,-20.32)
R0201 [mm]
  rect 0.25x0.35 smd: 1(-0.275,0) 2(0.275,0)
  silkscreen extent -0.5,-0.25 0.5,0.25, body extent -0.3,-0.15 0.3,0.15, height 0.23
R0201_NOP [mm]
  rect 0.25x0.35 smd: 1(-0.275,0) 2(0.275,0)
  silkscreen extent -0.5,-0.25 0.5,0.25
R2520-40.000-12-F-1010-TR-NS1 [mm]
  rect 1x0.9 smd: 1(-0.9,-0.7) 2(0.9,-0.7) 3(0.9,0.7) 4(-0.9,0.7)
  silkscreen extent -1.6,-1.3 1.6,1.3, body extent -1.25,-1 1.25,1, height 0.65
TWBGA-84_8X12P5_ISI [mil]
  round 16 smd: A1(-125.98,220.47) A2(-94.49,220.47) A3(-62.99,220.47) A7(62.99,220.47) A8(94.49,220.47) A9(125.98,220.47) B1(-125.98,188.98) B2(-94.49,188.98) B3(-62.99,188.98) B7(62.99,188.98) B8(94.49,188.98) B9(125.98,188.98) C1(-125.98,157.48) C2(-94.49,157.48) C3(-62.99,157.48) C7(62.99,157.48) C8(94.49,157.48) C9(125.98,157.48) D1(-125.98,125.98) D2(-94.49,125.98) D3(-62.99,125.98) D7(62.99,125.98) D8(94.49,125.98) D9(125.98,125.98) E1(-125.98,94.49) E2(-94.49,94.49) E3(-62.99,94.49) E7(62.99,94.49) E8(94.49,94.49) E9(125.98,94.49) F1(-125.98,62.99) F2(-94.49,62.99) F3(-62.99,62.99) F7(62.99,62.99) F8(94.49,62.99) F9(125.98,62.99) G1(-125.98,31.5) G2(-94.49,31.5) G3(-62.99,31.5) G7(62.99,31.5) G8(94.49,31.5) G9(125.98,31.5) H1(-125.98,0) H2(-94.49,0) H3(-62.99,0) H7(62.99,0) H8(94.49,0) H9(125.98,0) J1(-125.98,-31.5) J2(-94.49,-31.5) J3(-62.99,-31.5) J7(62.99,-31.5) J8(94.49,-31.5) J9(125.98,-31.5) K2(-94.49,-62.99) K3(-62.99,-62.99) K7(62.99,-62.99) K8(94.49,-62.99) K9(125.98,-62.99) L1(-125.98,-94.49) L2(-94.49,-94.49) L3(-62.99,-94.49) L7(62.99,-94.49) L8(94.49,-94.49) M2(-94.49,-125.98) M3(-62.99,-125.98) M7(62.99,-125.98) M8(94.49,-125.98) M9(125.98,-125.98) N1(-125.98,-157.48) N2(-94.49,-157.48) N3(-62.99,-157.48) N7(62.99,-157.48) N8(94.49,-157.48) P2(-94.49,-188.98) P3(-62.99,-188.98) P7(62.99,-188.98) P8(94.49,-188.98) P9(125.98,-188.98) R1(-125.98,-220.47) R2(-94.49,-220.47) R3(-62.99,-220.47) R7(62.99,-220.47) R8(94.49,-220.47)
  silkscreen extent -181,-246 157,246, body extent -159,-248 159,248, height 47
WIN_E-8_WIN [mil]
  rect 34x17 smd: 1(-154.5,75) 2(-154.5,25) 3(-154.5,-25) 4(-154.5,-75) 5(154.5,-75) 6(154.5,-25) 7(154.5,25) 8(154.5,75)
  rect 136x171 smd: 9(0,0)
  silkscreen extent -181,-118 157,136, body extent -159,-120 159,120, height 31

## Part data
A1: "CONN UMC JACK STR SMD", Manufacturer="Linx Technologies Inc.", Part Number=CONMHF1-SMD-G-T, PCB DECAL=CONMHF1-SMD-G-T, Prefered Vender=Digikey, Revision=A, Type=Connector
C1 C2 C3 C17 C28 C29 C36 C38 C42 C44 C48: "CAP CER 1UF 6.3V X7R 0402", Aligni Value=1u, Manufacturer="Murata Electronics", Part Number=GRM155R70J105KA12D, Geometry.Height=0.33mm, PCB DECAL=RC0402, Prefered Vender=Digikey, Revision=A, Type=Capacitor
C4 C5 C6 C7 C8 C9 C10 C11 C12 C13 C14 C15 C16 C18 C19 C20 C21 C22 C23 C24 C34 C63 C65 C66 C67 C68 C69 C70 C71 C72 C73 C75 C80: "CAP CER 0.1UF 16V X7R 0201", Aligni Value=0.1u, Manufacturer="Murata Electronics", Part Number=GRM033Z71C104KE14D, Geometry.Height=0.33mm, PCB DECAL=RC0201, Prefered Vender=Digikey, Revision=A, Type=Capacitor
C25 C27 C40 C74: "CAP CER 2.2UF 10V X7R 0402", Aligni Value=2.2u, Manufacturer="Murata Electronics", Part Number=GRM155Z71A225KE01D, Geometry.Height=0.33mm, PCB DECAL=RC0402, Prefered Vender=Digikey, Revision=A, Type=Capacitor
C26 C32 C33 C35 C49 C76 C79: "CAP CER 4.7UF 10V X5R 0402", Aligni Value=4.7u, Manufacturer="Samsung Electro-Mechanics", Part Number=CL05A475MP5NRNC, Geometry.Height=0.33mm, PCB DECAL=RC0402, Prefered Vender=Digikey, Revision=A, Type=Capacitor
C30 C31: "CAP CER 10UF 6.3V X5R 0402", Aligni Value=10u, Manufacturer="Murata Electronics", Part Number=GRM155R60J106ME05J, Geometry.Height=0.33mm, PCB DECAL=C0402, Prefered Vender=Digikey, Revision=A, Type=Capacitor
C37 C39 C41 C43 C45 C46 C47: "CAP CER 100PF 16V X7R 0201", Aligni Value=100p, Manufacturer="Walsin Technology Corporation", Part Number=0201B101K160CT, Geometry.Height=0.33mm, PCB DECAL=RC0201, Prefered Vender=Digikey, Revision=A, Type=Capacitor
C50 C56 C57: "CAP CER 10PF 25V C0G/NP0 0201", Aligni Value=10p, Manufacturer="Walsin Technology Corporation", Part Number=0201N100J250CT, Geometry.Height=0.33mm, PCB DECAL=RC0201, Prefered Vender=Digikey, Revision=A, Type=Capacitor
C51 C52 C61 C62: "CAP CER 2PF 25V C0G/NP0 0201", Aligni Value=2p, Manufacturer="Samsung Electro-Mechanics", Part Number=CL03C020BA3GNNC, Geometry.Height=0.33mm, PCB DECAL=RC0201, Prefered Vender=Digikey, Revision=A, Type=Capacitor
C53 C54 C55: "NOP", Aligni Value=12p, Geometry.Height=0mm, Manufacturer=NOP, Part Number=NOP, PCB DECAL=RC0201, Prefered Vender=NOP, Revision=NOP, Type=Capacitor
C58 C59: "CAP CER 1.2PF 25V C0G/NP0 0201", Aligni Value=1.2P, Manufacturer="Murata Electronics", Part Number=GRM0335C1E1R2WA01D, Geometry.Height=0.33mm, PCB DECAL=RC0201, Prefered Vender=Digikey, Revision=A, Type=Capacitor
C60: "CAP CER 9PF 25V C0G 0201", Aligni Value=9p, Manufacturer="TDK Corporation", Part Number=CGA1A2C0G1E090D030BA, Geometry.Height=0.33mm, PCB DECAL=RC0201, Prefered Vender=Digikey, Revision=A, Type=Capacitor
C64 C77 C78: "CAP CER 1500PF 16V X7R 0201", Aligni Value=1.5n, Manufacturer="TDK Corporation", Part Number=CGA1A2X7R1C152K030BA, Geometry.Height=0.33mm, PCB DECAL=RC0201, Prefered Vender=Digikey, Revision=A, Type=Capacitor
L1: "POWER CHOKE MOLDED 2.2UH 1.9A", Aligni Value=2.2u, Manufacturer="Walsin Technology Corporation", Part Number=WLPH201610M2R2PP, Geometry.Height=1.5mm, PCB DECAL=RC0805, Prefered Vender=Digikey, Revision=A, Type=Inductor
L2 L3 L7: "INDUCTOR FIXED 1.5NH 0201", Aligni Value=1.5n, Manufacturer="Walsin Technology Corporation", Part Number=WLCM0603TGB1N5TB, Geometry.Height=1.5mm, PCB DECAL=RC0201, Prefered Vender=Digikey, Revision=A, Type=Inductor
L4 L5: "FIXED IND 2.5NH 500MA 200MOHM SM", Aligni Value=2.5n, Manufacturer="Murata Electronics", Part Number=LQP03TN2N5B02D, Geometry.Height=1.5mm, PCB DECAL=RC0201, Prefered Vender=Digikey, Revision=A, Type=Inductor
L6: "FIXED IND 1.8NH 200MA 550MOHM SM", Aligni Value=1.8n, Manufacturer="TE Connectivity Passive Product", Part Number=1-2176075-8, Geometry.Height=1.5mm, PCB DECAL=RC0201, Prefered Vender=Digikey, Revision=A, Type=Inductor
R1 R2: "RES 1K OHM 1% 1/20W 0201", Aligni Value=1k, Manufacturer="Stackpole Electronics Inc", Part Number=RMCF0201FT1K00, Geometry.Height=0.6mm, PCB DECAL=RC0201, Prefered Vender=Digikey, Revision=A, Type=Resistor
R3: "RES 100 OHM 1% 1/20W 0201", Aligni Value=100, Manufacturer=Yageo, Part Number=RC0201FR-07100RL, Geometry.Height=0.5mm, PCB DECAL=RC0201, Prefered Vender=Digikey, Revision=A, Type=Resistor
R4 R10 R11 R22: "RES 22 OHM 1% 1/20W 0201", Aligni Value=22, Manufacturer=Yageo, Part Number=RC0201FR-0722RL, Geometry.Height=0.5mm, PCB DECAL=RC0201, Prefered Vender=Digikey, Revision=A, Type=Resistor
R5 R8 R14 R15 R17 R18 R19 R21: "RES 4.7K OHM 1% 1/20W 0201", Aligni Value=4.7k, Manufacturer=Yageo, Part Number=RC0201FR-074K7L, Geometry.Height=0.5mm, PCB DECAL=RC0201, Prefered Vender=Digikey, Revision=A, Type=Resistor
R6 R7 R13 R16: "RES SMD 10K OHM 1% 1/20W 0201", Aligni Value=10k, Manufacturer=Yageo, Part Number=RC0201FR-0710KP, Geometry.Height=0.5mm, PCB DECAL=RC0201, Prefered Vender=Digikey, Revision=A, Type=Resistor
R9 R12: "RES 50 OHM 0.1% 0.075W 0201", Aligni Value=50, Manufacturer="Vishay Dale", Part Number=TNPW020150R0BEED, Geometry.Height=0.5mm, PCB DECAL=RC0201, Prefered Vender=Digikey, Revision=A, Type=Resistor
R20: "NOP", Aligni Value=NOP, Geometry.Height=0mm, Manufacturer=NOP, Part Number=NOP, PCB DECAL=RC0201, Prefered Vender=NOP, Revision=A, Type=Resistor
R23: "RES 24.3K OHM 1% 1/20W 0201", Aligni Value=24.3k, Manufacturer=YAGEO, Part Number=RC0201FR-0724K3L, Geometry.Height=0.6mm, PCB DECAL=RC0201, Prefered Vender=Digikey, Revision=A, Type=Resistor
R24: "RES SMD 5.1K OHM 1% 1/20W 0201", Aligni Value=5.1k, Manufacturer=YAGEO, Part Number=AC0201FR-075K1L, Geometry.Height=0.6mm, PCB DECAL=RC0201, Prefered Vender=Digikey, Revision=A, Type=Resistor
S1: "O2S SHIELD", Manufacturer="RYSE Inc.", Geometry.Height=0mm, Part Number=O2S-SHIELD, PCB DECAL=O2S-SHIELD, Prefered Vender=Digikey, Revision=A, Type="Electronic OEM Component"
U1: "580Mhz 32bits Networking Processor", Manufacturer="MediaTek Inc", Geometry.Height=0mm, Part Number=MT7688AN, PCB DECAL=DR-QFN-128, Type=IC
U2: "IC DRAM 512MBIT PARALLEL 84VFBGA", Manufacturer="Winbond Electronics", Part Number=W9751G6NB-25, PCB DECAL=TWBGA-84_8X12P5_ISI, Prefered Vender=Digikey, Type=IC
U3: "IC FLASH 128MBIT SPI/QUAD 8WSON", Manufacturer="Winbond Electronics", Part Number=W25Q128JVEIQ, PCB DECAL=WIN_E-8_WIN, Prefered Vender=Digikey, Type=IC
U4: "RX TXRX MODULE WIFI U.FL SMD", Manufacturer="Onion Corporation", Part Number=OM-O2S, Geometry.Height=0mm, PCB DECAL=OMEGA2S+PCB, Prefered Vender=Digikey, Revision=A, Type="Electronic OEM Component"
X3: "CRYSTAL 40.0000MHZ 12PF SMD", Aligni Value=40Meg, Manufacturer="Raltron Electronics", Geometry.Height=0.9mm, Part Number=R2520-40.000-12-F-1010-TR-NS1, PCB DECAL=R2520-40.000-12-F-1010-TR-NS1, Prefered Vender=Digikey, Revision=A, Type=Crystal

## Free pads (board coordinates)
  round 40 smd far side paste-30: 2(303.15,-610.24) 3(255.91,-228.35) 4(303.15,-531.5) 5(224.41,503.94) 6(110.24,-248.03) 7(216.54,326.77)

## Via types
v1: diameter 10, hole 4, Top to Bottom, tented both sides, 476 vias

## Nets (pads, with @x,y where several pads share a name; then routed paths per layer and width w, separated by ;. In a path a pad name is that pad's centre, name@x,y a point inside that pad or via, vN(x,y) a via of type N, cw(c..) or ccw(c..) an arc to the next point about the centre after c; other vN are vias at no path point)
1V2: C20.1 C21.1 C22.1 C23.1 C24.1 C30.1 C31.1 C32.1 C63.2 C76.1 L1.2 pad.3 U1.22 U1.58 U1.89 U1.91 U1.122 U1.131 U1.145 | length 401.1
  Top w8: C23.1@-334.65,91.54 -319.01,91.54 -315.54,95 v1(-315,95) ; v1@-313.54,96.46 U1.58@-259.84,96.46 ; U1.89@-112.2,-149.6 -112.2,-171.25 -107,-176.46 v1(-107,-177) ; C22.1@-110.24,-204.79 -110.24,-180.69 v1@-107.01,-177.46 ; v1(-93.64,-172.07) -93.64,-171.53 -92.52,-170.41 U1.91@-92.52,-149.6 ; v1@-93.04,-172.39 -93.64,-173 -93.64,-190.29 -88.81,-195.12 -88.81,-204.79 -87.58,-206.02 C20.1@-86.61,-206.02 ; v1(-45,264) -44.62,264.38 -44.62,286.88 U1.22@-43.31,288.19 ; C24.1@-35.43,367.13 -35.32,367.02 -35.32,356.44 v1(-35.22,356.33) ; v1(153,28) 153.22,27.78 177.73,27.78 U1.131@177.95,27.56 ; v1@154.53,164.37 155.51,165.36 U1.145@177.95,165.36 ; U1.122@212.6,-61.02 v1(230.4,-61.02) ; v1(248.63,165.37) 248.94,165.42 254.63,171.11 264.25,171.11 265.17,172.03 C21.1@265.17,174 ; v1(254.51,30.38) 254.89,30.77 264.25,30.77 265.17,31.69 C63.2@265.17,33 ; v1(297.64,50.56) 298.02,50.18 313.19,50.18 316.41,46.96 C32.1@316.41,46.26
  Bottom w8: v1(213.57,-248) 230.3,-248 249.96,-228.35 pad.3@255.91,-228.35
  other v1: 213.57,-233 303.15,-224.41 213,-217 303.15,-204.72 213,-202 303.15,-185.04 303.15,-165.35 153.54,165.35
1V8: C1.1 C2.1 C3.1 C6.1 C7.1 C8.1 C9.1 C10.1 C26.1 C27.1 C64.1 C65.1 C66.1 C67.1 C68.1 C69.1 C70.1 C71.1 C72.1 C73.1 C74.1 C77.1 C78.1 C79.1 pad.4 U1.79 U1.98 U1.116 U1.125 U2.A1 U2.A9 U2.C1 U2.C3 U2.C7 U2.C9 U2.E1 U2.E9 U2.G1 U2.G3 U2.G7 U2.G9 U2.J1 U2.J9 U2.M9 U2.R1 | length 1479.7
  Top w8: v1(-334.84,-185.88) -334.74,-185.98 -334.74,-201.67 C64.1@-334.65,-201.77 ; v1(-334.84,-170.4) -334.65,-170.21 C1.1@-334.65,-160.43 ; v1(-328.9,-359) -328.49,-359 -320.87,-351.38 C9.1@-318.9,-351.38 ; U2.R1@-263.78,-350.39 -262.74,-349.36 -262.74,-338.28 -261.59,-337.12 v1(-261.59,-336.58) ; v1(-225.9,-159.72) -225.36,-159.72 -222.69,-157.05 -212.53,-157.05 -210.63,-155.15 U1.79@-210.63,-149.6 ; C70.1@-211.81,-648.84 -211.71,-648.75 -211.71,-637.24 v1(-211.81,-637.14) ; v1(-180.3,-225.58) -180.3,-226.12 -189.97,-235.79 -189.97,-256.88 C74.1@-171.26,-275.59 ; U2.M9@-169.29,-602.36 -168.18,-602.36 -157.08,-613.46 v1(-156.54,-613.46) ; C67.1@-156.25,-653.3 -156.25,-634.81 v1(-156,-634.56) ; C73.1@-96.46,-286.42 -95.54,-287.34 -95.54,-290.86 -70.69,-315.71 -70.69,-327.01 -82.29,-338.62 -83.52,-338.62 v1(-83.9,-339) -83.9,-339.54 -74.8,-348.64 U2.J1@-74.8,-350.39 ; v1(-75,-618) -74.9,-617.9 -74.9,-602.46 U2.J9@-74.8,-602.36 ; C69.1@-42.16,-653.38 -42.16,-634.16 v1(-42,-634) ; v1(-25.8,-365) -25.8,-364.69 -11.81,-350.7 U2.G1@-11.81,-350.39 ; v1(-25.75,-180.74) -26.14,-181.12 -26.14,-193.46 C2.1@-31.5,-198.82 -24.61,-205.71 C77.1@3.94,-205.71 ; v1(-24.09,-95) -23.85,-95.23 -23.85,-114.73 U1.98@-23.62,-114.96 ; v1(-13.51,-430.39) -13.13,-430 -13.13,-414.71 U2.G3@-11.81,-413.39 ; U2.G9@-11.81,-602.36 -11.38,-602.79 -11.38,-618.62 v1(-11,-619) ; U2.G7@-11.81,-539.37 -10.83,-538.39 -10.83,-524.93 v1(-10.45,-524.55) ; C68.1@12.9,-653.44 12.9,-635.1 v1(13,-635) ; v1(51,-618) 51.09,-617.91 51.09,-602.45 U2.E9@51.18,-602.36 ; U2.E1@51.18,-350.39 51.62,-349.96 51.62,-334.38 v1(52,-334) ; v1@51.18,-334.65 51.18,-328.84 42.45,-320.11 42.45,-307.94 49.52,-300.87 63.79,-300.87 70.01,-294.65 70.01,-294.25 77.84,-286.42 C65.1@79.81,-286.42 ; C8.1@67.96,-653.5 v1(68,-635) v1(68,-635) ; C78.1@98.42,-217.52 100.39,-217.52 103.59,-220.71 123.77,-220.71 C3.1@145.67,-198.82 ; C72.1@113.13,-285.68 113.13,-290.98 114.17,-292.03 U2.C1@114.17,-350.39 114.33,-350.39 129.12,-365.19 v1(129.29,-365.19) ; U2.C9@114.17,-602.36 114.27,-602.36 126.91,-615 v1(127,-615) ; U2.C7@114.17,-539.37 114.27,-539.37 128.9,-554 v1(129,-554) ; U2.C3@114.17,-413.39 114.17,-415.31 128.28,-429.42 128.28,-430.83 v1(128.66,-431.22) ; C7.1@126.98,-653.53 v1(127,-634) ; C3.1@147.64,-205.71 147.64,-196.85 176.71,-167.77 182.09,-167.77 v1(182.47,-167.39) ; U1.116@153.54,-114.96 153.54,-113.49 155.44,-111.6 169.93,-111.6 v1(170.32,-111.22) ; v1(154.68,-42) 155.06,-42.38 155.06,-57.77 156.99,-59.71 v1(156.99,-60.25) ; v1@156.29,-32.25 157,-31.54 v1(157,-31) ; U2.A9@177.16,-602.36 190,-615.2 v1@190,-616 ; U1.125@177.7,-31.25 U1.125@177.95,-31.49 ; U2.A1@178,-350 178.2,-350.2 207.8,-350.2 v1(208,-350) ; v1@208.67,-350.38 208.92,-350.38 209.92,-351.38 C6.1@244.09,-351.38 ; v1(228.35,-531.5) 228.73,-531.11 243.49,-531.11 C71.1@244.09,-530.51 ; v1(229,-627) C10.1@245.08,-626.97 ; v1(231,-452) 231.11,-451.89 244.57,-451.89 245.08,-451.38 250.68,-451.38 251.07,-451.77 ; v1(255.72,-43.14) 255.72,-43.68 259.19,-47.15 259.19,-52.75 C26.1@267,-60.57 ; v1(277.36,-356.79) 277.74,-357.17 277.74,-368.73 C79.1@285,-375.98 ; v1(303,-29) 303.38,-29.38 303.38,-36.1 320.08,-52.8 C27.1@320.08,-53
  Top w10: v1(154.68,-42) 154.68,-33.87 v1@156.29,-32.25 ; v1@156.34,-31.25 U1.125@177.7,-31.25
  Bottom w8: v1(-25.75,-180.74) -26,-180.49 -26,-104.89 -24.38,-103.27 -24.38,-95.3 v1(-24.09,-95) ; v1(157,-31) 200.24,-31 212.39,-43.14 v1(255.72,-43.14) ; v1(228.35,-531.5) pad.4@303.15,-531.5 ; 262,-39.07 272.07,-29 v1(303,-29)
  other v1: 189,-615
3V3: C14.1 C15.1 C16.1 C17.1 C18.1 C19.1 C25.1 C28.1 C29.1 C33.1 C34.1 C35.1 C36.1 C37.1 C38.1 C39.1 C40.1 C41.1 C42.1 C43.1 C44.1 C45.1 C46.1 C47.1 C48.1 C49.1 C50.1 C80.1 pad.5 R9.2 R12.2 R13.2 R14.2 R16.2 R20.1 R21.1 U1.8 U1.14 U1.15 U1.23 U1.32 U1.38 U1.41 U1.53 U1.60 U1.117 U1.123 U1.124 U1.134 U1.146 U1.149 U1.150 U1.154 U1.155 U4.C17 U4.C18 | length 1277.7
  Top w8: C14.1@-350.39,201.77 v1(-338.81,201.79) ; C16.1@-350.39,274.61 -350.09,274.3 -335.3,274.3 v1(-335,274) ; C34.1@-334.65,69.88 -315.76,69.89 -312.81,72.83 v1(-312.27,72.83) ; v1(-315.48,150.86) -315.48,151.4 -310,156.87 C35.1@-310,181.77 ; v1@-313.19,73 -311.56,73 -307.79,76.77 U1.60@-259.84,76.77 ; v1(-311,322) C17.1@-311,341.57 ; v1(-228,355) -228.17,355.17 -228.17,366.2 -227.38,367 C80.1@-226.25,367 ; U1.53@-225.2,145.67 -225.03,145.83 -205.17,145.83 v1(-205,146) ; U1.41@-225.2,263.78 v1@-203.22,263.78 ; v1(-217,289) -216.46,289 -215.65,288.19 U1.38@-200.79,288.19 ; C15.1@-153.54,367.13 -151.58,367.13 -150.65,366.2 -150.65,360.2 -147,356.54 v1(-147,356) ; v1(-142,264) -141.87,264.13 -141.87,288.06 U1.32@-141.73,288.19 ; R21.1@-106.3,388.78 -106,389.08 v1@-106,400 ; C19.1@-58.65,367.13 -57.73,366.2 -57.73,357.01 -53.15,352.43 U1.23@-53.15,322.84 ; R20.1@11,388.83 12.97,388.83 13.89,389.75 13.89,401.35 17,404.46 v1(17,405) ; U1.15@25.59,322.84 25.63,322.88 25.63,349.19 28.02,351.57 28.02,352.65 30.11,354.75 30.11,366.25 31.03,367.17 C43.1@33,367.17 ; v1(35,263) 35.22,263.22 35.22,287.97 U1.14@35.43,288.19 ; C42.1@74.8,419.29 74.88,419.22 94.24,419.22 v1(94.31,419.15) ; C46.1@81,367.17 81,349.98 81.7,349.28 v1(81.7,348.74) ; U1.8@94.49,288.19 94.49,261.51 v1@95,261 ; C47.1@106.97,367.17 107.89,366.25 107.89,362.04 112.58,357.35 v1(112.58,356.81) ; v1(144,351) 144.38,351.38 144.38,354.52 152.03,362.17 R9.2@154,362.17 ; v1(153.54,204.72) U1.149@177.95,204.73 ; U1.117@163.39,-149.6 199.4,-149.6 v1(213,-136) ; U1.123@177.95,-51.18 179.77,-49.36 192.64,-49.36 198.84,-43.16 210.78,-43.16 U1.124@212.6,-41.34 214.42,-43.16 230.93,-43.16 245.4,-57.64 245.4,-65.04 v1(245.78,-65.43) ; U1.155@177.95,263.78 178.14,263.97 178.14,279.81 v1(178.33,280) ; v1(181,351) 181.05,351.05 181.05,362.12 R12.2@181.1,362.17 ; U1.134@212.6,57.09 214.4,58.89 231.25,58.89 v1(231.63,59.27) ; U1.146@212.6,175.2 214.42,177.02 232.48,177.02 242.46,187 v1(243,187) 243.38,187.38 255.43,187.38 260.96,192.91 C18.1@264.76,192.91 ; U1.150@212.6,214.57 213.16,215.13 238.77,215.13 240.79,217.15 v1(241.33,217.15) ; U1.154@212.6,253.94 237.4,253.94 242.46,259 v1(243,259) 243,259.46 249.54,266 C39.1@265.17,266 ; R14.2@216,451.83 v1(216,463) ; R16.2@233.83,-291 v1@249,-291 ; v1@241.54,216 245.54,220 C41.1@265.17,220 ; v1(250.38,241.84) 250.76,242.23 C37.1@264.4,242.23 ; v1(251,-291) C50.1@263.17,-291 ; v1(253,289) 264.25,289 C45.1@264.25,288.8 ; R13.2@287,124 287,127.25 297.54,137.8 C33.1@320.87,137.79 320.93,137.86 320.93,156.93 v1(321,157) ; v1(306.9,-115.57) 307.29,-115.19 307.29,-103 C25.1@312.28,-98 ; C28.1@320.57,-9 337.62,-26.05 337.62,-31.62 v1(338,-32) ; C40.1@320.87,178 C40.1@320.87,181.1 320.93,181.17 320.93,200.93 v1(321,201) ; C36.1@320.87,227 C36.1@320.87,224.41 321.62,225.16 321.62,243.62 v1(322,244) ; C38.1@320.87,267.72 322.65,269.5 322.65,286.93 v1(323.04,287.31) ; C44.1@320.87,316 C44.1@320.87,311.02 320.93,311.09 320.93,330.93 v1(321,331) ; C29.1@321,88 327.62,81.38 327.62,70.38 v1(328,70) ; C48.1@322.84,-375.99 323.47,-376.62 347.62,-376.62 v1(348,-377) ; C49.1@326.93,-332.84 326.89,-332.89 326.89,-350.89 v1(327,-351)
  Bottom w8: v1(216,463) 216,463.54 224.4,471.94 pad.5@224.41,503.94
  other v1: 95,262 -203,264 28.02,352.11 -57.73,358.21 -106,401
ANT_OUT: A1.1 C62.1 L7.2 U4.C2 | length 258.8
  Top w3.63: L7.2@149.61,581.69 151.57,581.69 168.16,565.11 168.16,563.14 C62.1@172.3,559 ; C62.1@173.23,560.04 212.4,560.04 221.14,568.78 221.14,576.62 235.07,590.55 A1.1@236.22,590.55 249.77,577 U4.C2@375.94,577
CLKOUTP: pad.7 U1.153 | length 150.3
  Top w4: v1@147.86,250.97 154.74,244.1 U1.153@177.95,244.1
  Bottom w4: v1(147.34,252.02) 172.56,252.02 189.81,269.27 189.81,300.91 pad.7@215.33,326.43
DDR_1V8: C11.1 R1.2 | length 48.1
  Top w8: C11.1@-39.74,-286.79 -39.18,-287.34 -39.18,-309.57 -38.55,-310.2 v1(-38.55,-310.74) ; C11.1@-39.37,-286.42 R1.2@-15.75,-286.42
DDR_A0: U1.80 U2.M8 | length 916.8
  Top w3.63: v1(-223.74,-124.46) -223.74,-124.03 -214.66,-114.96 U1.80@-200.79,-114.96 ; v1(-216.98,-622) -205.79,-622 -200.98,-626.82 -191.52,-626.82 -183.11,-618.41 -183.11,-584.68 -170,-571.57 U2.M8@-170,-571
  Inner3 w3.1: v1(-223.74,-124.46) -224.7,-125.42 -224.7,-137.01 -239,-151.31 -239,-162 -239,-168.49 -235.72,-171.77 -227.42,-171.77 -224.15,-175.04 -224.15,-181.59 -227.42,-184.87 -245.72,-184.87 -249,-188.14 -249,-194.7 -245.72,-197.97 -227.42,-197.97 -224.15,-201.25 -224.15,-207.8 -227.42,-211.07 -245.72,-211.07 -249,-214.35 -249,-220.9 -245.72,-224.17 -242.28,-224.17 -239,-227.45 -239,-229 -239,-230.48 -247.8,-239.28 -247.8,-305.11 -242.47,-310.45 -242.47,-333.51 -242.47,-334.65 -242.77,-334.95 -242.77,-347.52 -246.04,-350.79 -249.49,-350.79 -252.77,-354.07 -252.77,-360.62 -249.49,-363.89 -246.04,-363.89 -242.77,-367.17 -242.77,-368.72 -242.77,-382.03 -258.46,-397.73 -264,-403.27 -264,-508.19 -267.28,-511.46 -270.72,-511.46 -274,-514.74 -274,-521.29 -270.72,-524.56 -251.29,-524.56 -248.01,-527.84 -248.01,-534.39 -251.29,-537.67 -270.72,-537.67 -274,-540.94 -274,-547.49 -270.72,-550.77 -251.29,-550.77 -248.01,-554.04 -248.01,-560.59 -251.29,-563.87 -270.72,-563.87 -274,-567.14 -274,-573.7 -270.72,-576.97 -251.29,-576.97 -248.01,-580.25 -248.01,-586.8 -251.29,-590.07 -270.72,-590.07 -274,-593.35 -274,-599.9 -270.72,-603.17 -267.28,-603.17 -264,-606.45 -264,-608 -264,-611.92 -253.92,-622 v1(-216.98,-622)
DDR_A1: U1.88 U2.M3 | length 949.1
  Top w3.63: v1(-180.43,-464.78) -170.15,-454.5 -170.15,-415.15 U2.M3@-169,-414 ; v1(-168,50) -154.93,36.93 -154.93,-26.07 ; -155,-26 -154.93,-26.07 ; -131.37,-69 -131.37,-56.86 ; U1.88@-122.05,-114.96 -122.05,-93.4 -125.03,-90.42 -131.37,-84.08 -131.37,-76 -131.37,-56.86 ; -154.93,-26.07 -131.37,-49.63 -131.37,-56.86
  Inner3 w3.1: v1(-180.43,-464.78) -181,-464.21 -181,-435.8 -178.27,-433.07 -178.27,-427.08 -178.27,-424.33 -181,-421.6 -181,-399.32 -184.28,-396.05 -195.62,-396.05 -198.9,-392.77 -198.9,-386.22 -195.62,-382.95 -184.28,-382.95 -181,-379.67 -181,-373.12 -184.28,-369.84 -195.62,-369.84 -198.9,-366.57 -198.9,-360.02 -195.62,-356.74 -184.28,-356.74 -181,-353.47 -181,-294.51 -184.28,-291.24 -195.62,-291.24 -198.9,-287.96 -198.9,-281.41 -195.62,-278.13 -184.28,-278.13 -181,-274.86 -181,-271.75 -173.12,-263.86 -165.1,-255.84 -165.1,-225.86 -181.74,-209.22 -181.74,-195.26 -186,-191 -186,-176.35 -182.72,-173.07 -180.87,-173.07 -177.6,-169.8 -177.6,-163.25 -180.87,-159.97 -189.64,-159.97 -192.91,-156.7 -192.91,-150.14 -189.64,-146.87 -180.88,-146.87 -177.61,-143.59 -177.61,-137.04 -180.88,-133.77 -189.64,-133.77 -192.91,-130.49 -192.91,-123.94 -189.64,-120.67 -180.88,-120.67 -177.61,-117.39 -177.61,-110.84 -180.88,-107.56 -189.64,-107.56 -192.91,-104.29 -192.91,-97.74 -189.64,-94.46 -189.28,-94.46 -186,-91.19 -186,-67.17 -186,-49.23 -181.37,-44.59 -181.37,-39.19 -175.19,-33.01 -169.79,-33.01 -162.12,-25.35 -162.12,42.26 -168,48.13 v1(-168,50)
DDR_A2: U1.87 U2.M7 | length 910.1
  Top w3.63: U2.M7@-165.25,-538.25 -165.25,-543.41 -154.57,-554.09 -154.57,-579.43 -140.25,-593.75 v1(-140.25,-604.75) ; v1(-140.34,-182.76) -140.34,-182.32 -131.89,-173.86 U1.87@-131.89,-149.6
  Inner3 w3.1: v1(-140.34,-182.76) -140.34,-201.81 -143.79,-205.26 -143.79,-246.33 -139.55,-250.57 -139.55,-251.42 -139.55,-261.85 -142.83,-265.13 -144.26,-265.13 -147.53,-268.4 -147.53,-274.96 -144.26,-278.23 -126.6,-278.23 -123.32,-281.51 -123.32,-288.06 -126.6,-291.33 -144.26,-291.33 -147.53,-294.61 -147.53,-301.16 -144.26,-304.43 -126.6,-304.43 -123.32,-307.71 -123.32,-314.26 -126.6,-317.54 -144.26,-317.54 -147.53,-320.81 -147.53,-327.36 -144.26,-330.64 -139.83,-330.64 -136.55,-333.91 -136.55,-340.46 -139.83,-343.74 -144.26,-343.74 -147.53,-347.01 -147.53,-353.56 -144.26,-356.84 -126.6,-356.84 -123.32,-360.11 -123.32,-366.67 -126.6,-369.94 -144.26,-369.94 -147.53,-373.22 -147.53,-379.77 -144.26,-383.04 -126.6,-383.04 -123.32,-386.32 -123.32,-392.87 -126.6,-396.14 -144.26,-396.14 -147.53,-399.42 -147.53,-405.97 -144.26,-409.25 -126.6,-409.25 -123.32,-412.52 -123.32,-419.07 -126.6,-422.35 -133.74,-422.35 -137.01,-425.62 -137.01,-430.25 -130.27,-437 -130.27,-444.81 -127.45,-447.63 -127.45,-459.45 -133,-465 -141,-473 -141,-478.38 -144.28,-481.66 -147.72,-481.66 -151,-484.93 -151,-491.48 -147.72,-494.76 -127.52,-494.76 -124.24,-498.03 -124.24,-504.58 -127.52,-507.86 -147.72,-507.86 -151,-511.14 -151,-517.69 -147.72,-520.96 -127.52,-520.96 -124.24,-524.24 -124.24,-530.79 -127.52,-534.06 -147.72,-534.06 -151,-537.34 -151,-543.89 -147.72,-547.16 -127.52,-547.16 -124.24,-550.44 -124.24,-556.99 -127.52,-560.27 -147.72,-560.27 -151,-563.54 -151,-570.09 -147.72,-573.37 -144.28,-573.37 -141,-576.64 -141,-604 -140.6,-604.4 v1(-140.25,-604.75)
DDR_A3: U1.97 U2.N2 | length 898.1
  Top w3.63: U2.N2@-200.79,-381.89 -183.11,-399.57 -183.11,-419.11 -178,-424.22 -178,-433.18 -187.91,-443.09 -216.84,-443.09 -223.19,-449.44 -223.19,-472.99 -216.37,-479.81 v1(-196,-479.81) ; v1(-41.14,-176.34) -40.14,-176.34 -33.46,-169.66 U1.97@-33.46,-149.6
  Inner3 w3.1: v1(-41.14,-176.34) -39.82,-177.66 -39.82,-183.52 -28.45,-194.89 -28.45,-198 -28.45,-202.88 -25.17,-206.16 -21.72,-206.16 -18.45,-209.43 -18.45,-215.98 -21.72,-219.26 -33.07,-219.26 -36.35,-222.54 -36.35,-229.09 -33.07,-232.36 -21.72,-232.36 -18.45,-235.64 -18.45,-242.19 -21.72,-245.46 -33.07,-245.46 -36.35,-248.74 -36.35,-255.29 -33.07,-258.56 -21.72,-258.56 -18.45,-261.84 -18.45,-268.39 -21.72,-271.67 -35.17,-271.67 -38.45,-274.94 -38.45,-281.49 -35.17,-284.77 -21.72,-284.77 -18.45,-288.04 -18.45,-294.59 -21.72,-297.87 -25.17,-297.87 -28.45,-301.14 -28.45,-307.7 -25.17,-310.97 -21.72,-310.97 -18.45,-314.25 -18.45,-320.8 -21.72,-324.07 -33.07,-324.07 -36.35,-327.35 -36.35,-333.9 -33.07,-337.17 -31.72,-337.17 -28.45,-340.45 -28.45,-342 -28.45,-352.45 -36.35,-360.35 -36.35,-378.48 -24.07,-390.76 -24.07,-401 -24.07,-402.59 -27.34,-405.87 -33.07,-405.87 -36.35,-409.14 -36.35,-415.7 -33.07,-418.97 -27.34,-418.97 -24.07,-422.25 -24.07,-428.8 -27.34,-432.07 -29.07,-432.07 -32.35,-435.35 -32.35,-441.9 -29.07,-445.17 -27.34,-445.17 -24.07,-448.45 -24.07,-450 -24.07,-461.45 v1(-38.64,-476.02)
  Inner4 w3.09: v1(-196,-479.81) -180.35,-479.81 -163,-462.45 -163,-454.87 -149.59,-441.46 -133.63,-441.46 -127.83,-447.26 -127.83,-449.17 -119.97,-457.03 -119.97,-468.03 -115.46,-472.54 -101.7,-472.54 -100.16,-472.54 -96.89,-469.27 -96.89,-459.67 -93.62,-456.4 -87.07,-456.4 -83.8,-459.67 -83.8,-469.27 -80.53,-472.54 -73.99,-472.54 -70.72,-469.27 -70.72,-468.51 -67.44,-465.24 -60.9,-465.24 -57.63,-468.51 -57.63,-469.27 -54.36,-472.54 -47.33,-472.54 -43.91,-472.54 -40.43,-476.02 v1(-38.64,-476.02)